# Allegro board RK3328_DDR3P216SD4_Template_V10_20170228.brd
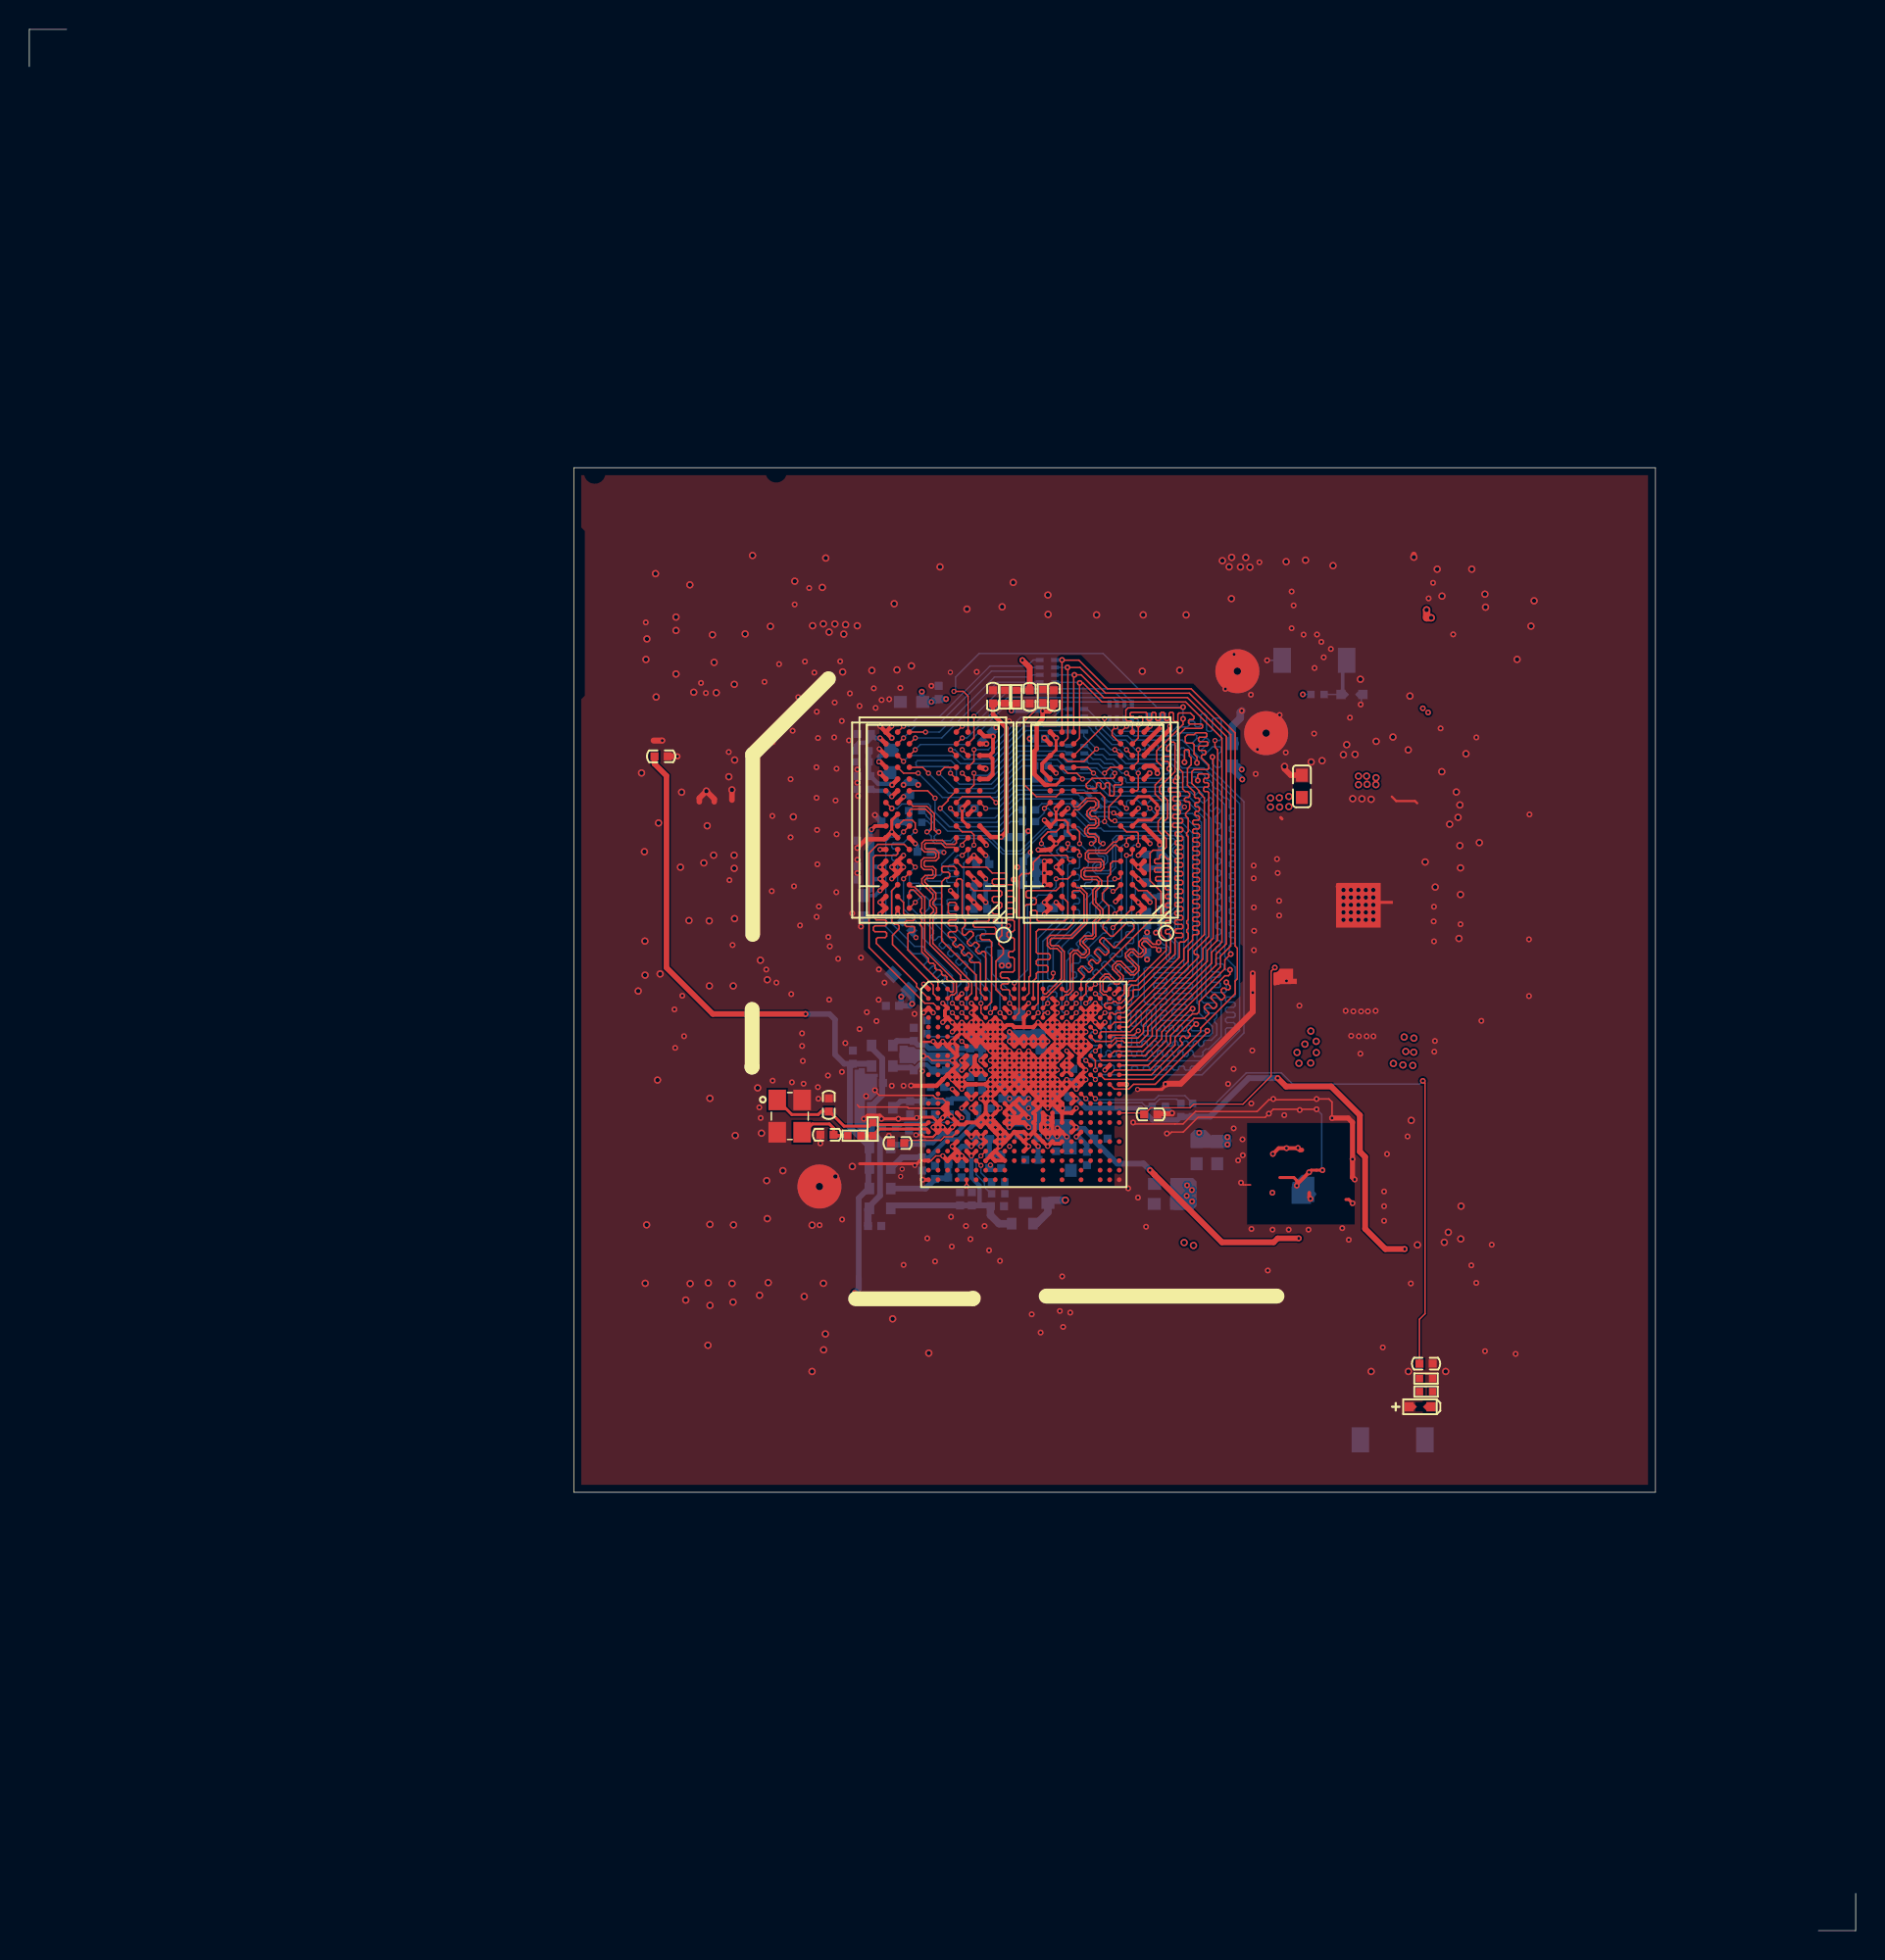
[diagram p0: board, top side]
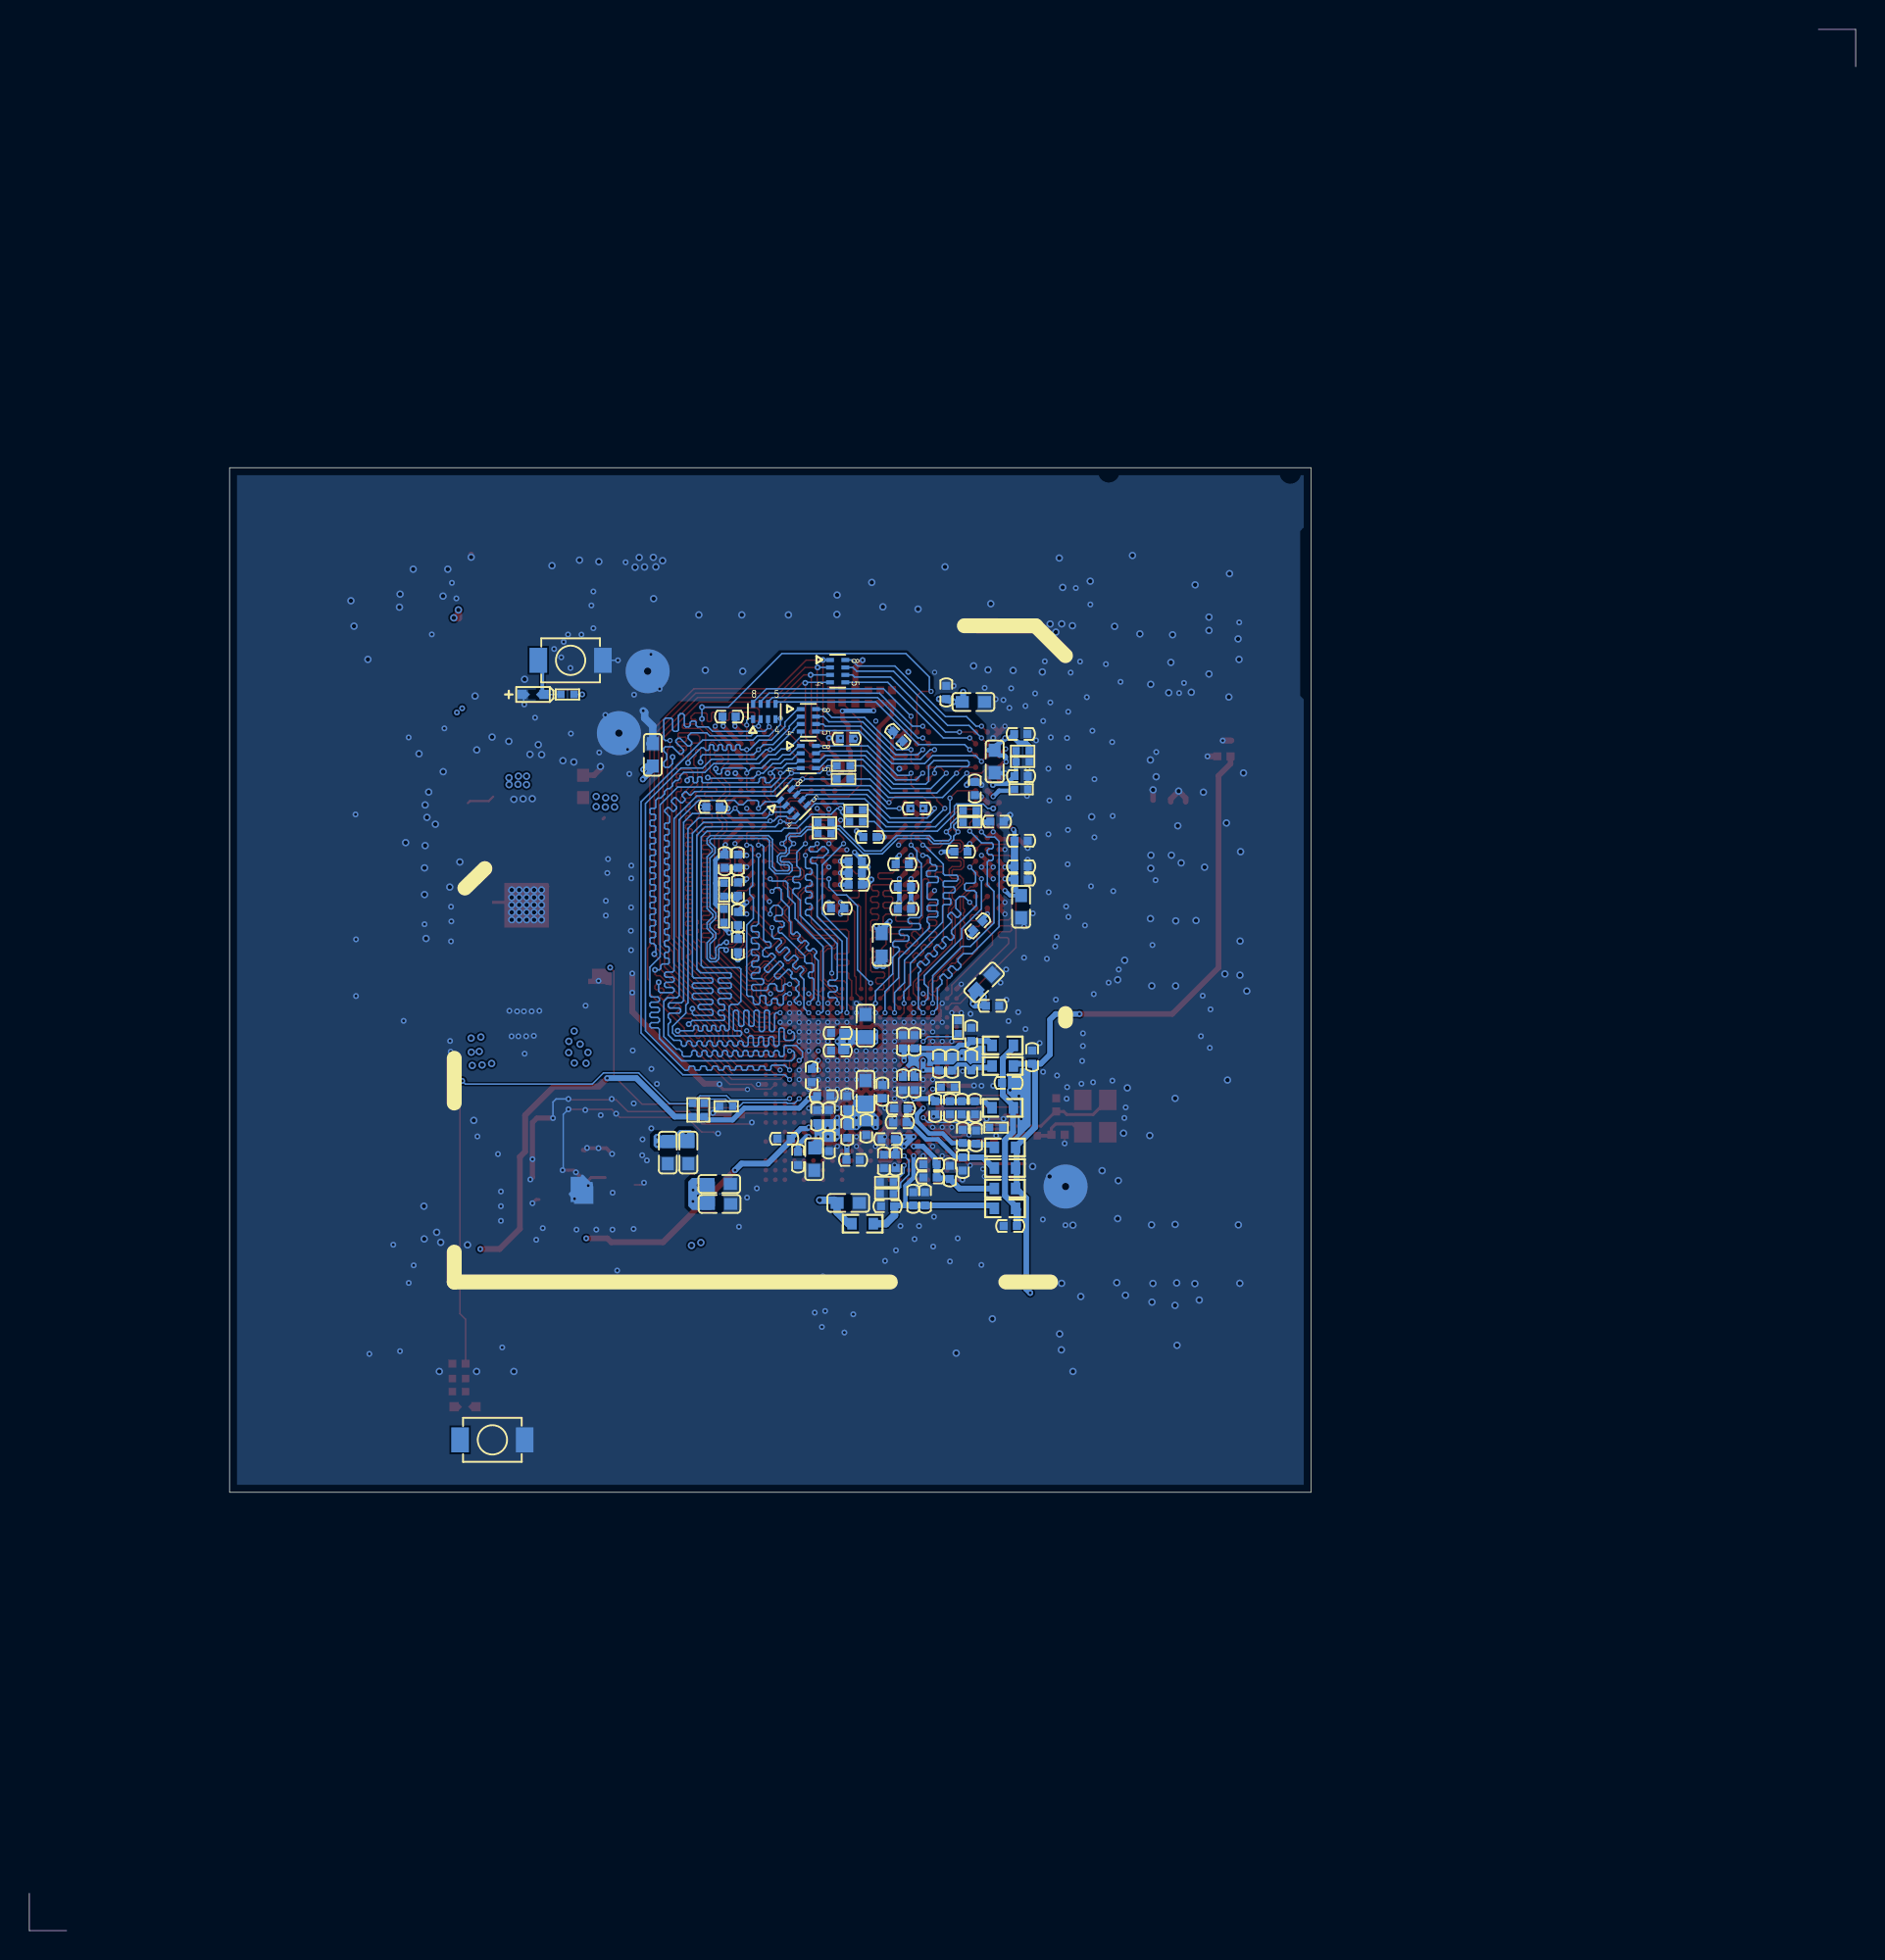
[diagram p1: board, bottom side, seen from below]

Outline 124.46 x 129.54 mm; copper layers: TOP, L2, L3, BOTTOM. Coordinates in mm from the lower left corner of the outline.
Outline path: 2.54,129.54 0,129.54 0,127 ; 124.46,2.54 124.46,0 121.92,0 ; 37.1,99.67 110.82,99.67 110.82,29.87 37.1,29.87 37.1,99.67

## Placement (name value [footprint] x y rotation side)
C800  10nF  [C0402]  70.77 55.46 90 bottom
C801  100nF  [C0402]  69.97 55.46 90 bottom
C802  100nF  [C0402]  69.97 53.56 270 bottom
C803  10uF  [C0603]  79.55 53.01 270 bottom
C804  22uF  [C0603]  70.97 52.56 270 bottom
C805  22uF  [C0603]  80.95 53.01 270 bottom
C806  10nF  [C0402]  66.32 57.16 90 bottom
C807  100nF  [C0402]  67.43 54.65 270 bottom
C808  100nF  [C0402]  68.72 56.41 90 bottom
C810  100nF  [C0402]  68.72 54.46 270 bottom
C811  10uF  [C0603]  67.47 57.16 90 bottom
C812  10uF  [C0603]  77.42 49.51 180 bottom
C813  22uF  [C0603]  68.65 49.58 180 bottom
C814  22uF  [C0603]  77.44 50.87 180 bottom
C900  12pF  [C0402]  54.36 54.23 180 top
C901  12pF  [C0402]  54.48 56.26 90 top
C902  100nF  [C0402]  60.27 59.06 90 bottom
C903  100nF  [C0402]  64.12 60.56 90 bottom
C904  4.7uF  [C0402]  60.27 61.06 90 bottom
C905  4.7uF  [C0402]  57.72 57.76 180 bottom
C906  100nF  [C0402]  64.92 60.56 90 bottom
C907  100nF  [C0402]  61.57 59.06 90 bottom
C908  4.7uF  [C0402]  62.47 59.06 90 bottom
C909  4.7uF  [C0402]  56.12 59.51 90 bottom
C910  100nF  [C0402]  70.32 56.86 180 bottom
C913  100nF  [C0402]  95.18 38.63 0 top
C1000  10nF  [C0402]  71.15 58.26 270 bottom
C1002  100nF  [C0402]  69.37 61.16 0 bottom
C1003  100nF  [C0402]  69.37 59.96 0 bottom
C1004  10uF  [C0603]  67.47 61.66 90 bottom
C1005  10uF  [C0603]  59.4 64.61 135 bottom
C1104  100nF  [C0402]  72.07 52.61 270 bottom
C1106  100nF  [C0402]  65.93 53.93 0 bottom
C1200  100nF  [C0402]  66.22 52.41 270 bottom
C1202  100nF  [C0402]  61.72 51.66 90 bottom
C1203  4.7uF  [C0402]  63.07 52.21 0 bottom
C1204  4.7uF  [C0402]  43.05 80.01 0 top
C1205  100nF  [C0402]  63.42 49.86 90 bottom
C1206  4.7uF  [C0402]  65.97 49.36 0 bottom
C1207  4.7uF  [C0402]  57.61 48.01 0 bottom
C1209  100nF  [C0402]  64.92 57.71 270 bottom
C1300  100nF  [C0402]  76.42 55.61 0 top
C1301  100nF  [C0402]  68.32 52.51 180 bottom
C1302  100nF  [C0402]  73.02 53.96 0 bottom
C1304  100nF  [C0402]  62.72 56.06 270 bottom
C1306  100nF  [C0402]  64.12 57.71 270 bottom
C1307  100nF  [C0402]  65.42 52.41 270 bottom
C1400  100nF  [C0402]  65.07 56.01 0 bottom
C1401  4.7uF  [C0402]  65.14 55.07 0 bottom
C1402  1nF  [C0402]  61.72 56.06 270 bottom
C1403  100nF  [C0402]  60.92 56.06 270 bottom
C1404  4.7uF  [C0402]  60.02 56.06 270 bottom
C1500  4.7uF  [C0402]  59.17 53.66 180 top
C1501  100nF  [C0402]  60.85 54.11 90 bottom
C1502  4.7uF  [C0402]  59.95 54.06 90 bottom
C1503  100nF  [C0402]  60.85 52.24 270 bottom
C1600  100nF  [C0402]  63.07 51.31 0 bottom
C1602  100nF  [C0402]  64.22 49.86 90 bottom
C1700  100pF  [C0402]  58.52 75.56 180 bottom
C1701  10nF  [C0402]  61.97 84.36 90 bottom
C1702  100nF  [C0402]  68.17 72.86 180 bottom
C1703  100nF  [C0402]  76.17 67.11 90 bottom
C1704  10nF  [C0402]  77.87 76.56 0 bottom
C1705  100nF  [C0402]  68.77 81.21 180 bottom
C1706  100nF  [C0402]  56.87 71.61 180 bottom
C1707  100nF  [C0402]  69.37 69.66 180 bottom
C1708  1nF  [C0402]  65.67 84.06 90 top
C1709  1nF  [C0402]  67.17 74.51 0 bottom
C1710  1nF  [C0402]  69.82 84.06 90 top
C1712  10uF  [C0603]  66.37 67.16 90 bottom
C1713  10uF  [C0603]  58.67 79.66 270 bottom
C1714  10uF  [C0603]  81.97 80.11 90 bottom
C1715  100nF  [C0402]  60.02 77.81 90 bottom
C1716  100nF  [C0402]  68.17 71.26 180 bottom
C1717  100nF  [C0402]  56.9 81.53 180 bottom
C1718  100nF  [C0402]  64.82 71.11 0 bottom
C1719  100nF  [C0402]  68.17 84.06 270 top
C1720  100nF  [C0402]  64.82 69.61 0 bottom
C1721  100nF  [C0402]  56.87 74.26 180 bottom
C1722  100nF  [C0402]  60.97 73.51 0 bottom
C1723  100nF  [C0402]  63.97 76.46 0 bottom
C1724  100nF  [C0402]  59.82 68.46 315 bottom
C1725  100nF  [C0402]  76.17 70.96 270 bottom
C1726  100nF  [C0402]  76.77 82.71 180 bottom
C1727  100nF  [C0402]  68.17 72.06 180 bottom
C1728  100nF  [C0402]  56.87 72.51 180 bottom
C1729  100nF  [C0402]  76.17 68.96 270 bottom
C1730  100nF  [C0402]  58.82 63.01 180 bottom
C1731  100nF  [C0402]  65.27 81.36 45 bottom
C1732  100nF  [C0402]  76.17 72.86 270 bottom
C1733  100nF  [C0402]  64.97 72.66 180 bottom
C1735  10uF  [C0603]  60.12 83.71 180 bottom
C1736  10uF  [C0603]  86.72 77.96 90 top
C1737  10uF  [C0603]  56.87 69.76 270 bottom
C1750  1nF  [C0402]  56.87 78.66 180 bottom
C1751  1nF  [C0402]  77.07 72.86 270 bottom
D900  ESD5451N  [ESD0402]  94.77 35.69 180 top
D1301  ESD5451N  [ESD0402]  90.14 84.22 0 bottom
L900  180R-100M  [L0603]  58.12 60.31 0 bottom
L901  180R-100M  [L0603]  58.12 58.91 0 bottom
L1201  180R-100M  [L0603]  57.97 50.56 0 bottom
L1202  180R-100M  [L0603]  57.97 49.21 0 bottom
L1203  180R-100M  [L0603]  67.67 48.17 180 bottom
L1401  180R-100M  [L0603]  57.97 51.96 0 bottom
L1402  180R-100M  [L0603]  58.12 56.06 0 bottom
L1501  180R-100M  [L0603]  57.97 53.36 0 bottom
R900  22R  [R0402]  56.22 54.16 180 top
R901  1M  [R0402]  57.47 54.61 90 top
R906  10K  [R0402]  78.47 55.91 90 bottom
R908  10K  [R0402]  76.97 56.16 0 bottom
R909  10K  [R0402]  79.27 55.91 90 bottom
R911  22R  [R0402]  95.18 36.73 180 top
R912  10K  [R0402]  95.18 37.62 0 top
R1200  133R  [R0402]  66.02 51.01 0 bottom
R1205  2K  [R0402]  61.17 61.56 90 bottom
R1301  22R  [R0402]  87.79 84.22 0 bottom
R1400  2K  [R0402]  61.87 57.46 180 bottom
R1501  2K  [R0402]  58.57 54.71 180 bottom
R1600  6.49K  [R0402]  66.02 50.21 0 bottom
R1700  49.9R  [R0402]  60.37 75.51 180 bottom
R1701  49.9R  [R0402]  60.37 76.31 180 bottom
R1702  240R  [R0402]  56.87 77.76 180 bottom
R1703  240R  [R0402]  69.07 84.11 90 top
R1705  1K  [R0402]  67.27 84.06 270 top
R1706  1K  [R0402]  56.77 80.39 0 bottom
R1707  1K  [R0402]  77.12 69.14 90 bottom
R1711  1K  [R0402]  66.47 84.06 90 top
R1712  56R  [R0402]  70.27 75.51 0 bottom
R1713  56R  [R0402]  70.27 74.76 0 bottom
R1714  56R  [R0402]  68.97 79.36 0 bottom
R1715  56R  [R0402]  68.97 78.46 0 bottom
R1716  56R  [R0402]  68.12 75.56 0 bottom
R1717  56R  [R0402]  68.12 76.36 0 bottom
R1718  1K  [R0402]  56.77 79.63 180 bottom
R1719  1K  [R0402]  77.11 70.92 270 bottom
RP1701  56R  [RP4_0408]  69.37 85.81 270 bottom
RP1702  56R  [RP4_0408]  71.37 79.96 270 bottom
RP1703  56R  [RP4_0408]  74.37 83.06 180 bottom
RP1704  56R  [RP4_0408]  71.37 82.46 270 bottom
RP1705  56R  [RP4_0408]  72.37 76.86 225 bottom
SW900  RECOVER_key  [TS-3220S]  92.9 33.44 0 bottom
SW1301  RESET_key  [TS-3220S]  87.57 86.55 0 bottom
U800  RK3328  [BGA395_14R00X14R00X1R24]  67.77 57.66 0 top
U1700  K4B4G1646Q  [FBGA96_14R00X11R00X1R20]  61.57 75.66 180 top
U1701  K4B4G1646Q  [FBGA96_14R00X11R00X1R20]  72.77 75.66 180 top
Y900  24MHz  [CRY4_3R20X2R50X0R80]  51.82 55.5 270 top

## Library data of the parts
C800-C808 C810-C814 C900-C910 C913 C1000 C1002-C1005 C1104 C1106 C1200 C1202-C1207 C1209 C1300-C1302 C1304 C1306 C1307 C1400-C1404 C1500-C1503 C1600 C1602 C1700-C1710 C1712-C1733 C1735-C1737 C1750 C1751 = CAP NP
D900 D1301 = DIODE BI_DIR TRIG
L900 L901 L1201-L1203 L1401 L1402 L1501 = INDUCTOR
R900 R901 R906 R908 R909 R911 R912 R1200 R1205 R1301 R1400 R1501 R1600 R1700-R1703 R1705-R1707 R1711-R1719 = RESISTOR
RP1701-RP1705 = RESISTOR 4PACK
SW900 SW1301 = SW KEY-SPST_0
U800 = DSP_RK3328
U1700 U1701 = DDR3_16bit
Y900 = CRYSTAL_4P

## Footprints (pads in the part's own frame, mm; a bottom-side part is the same pattern mirrored in y, then rotated)
BGA395_14R00X14R00X1R24
  round 0.325 smd: A1(-6.5,6.5) A2(-5.85,6.5) A3(-5.2,6.5) A5(-3.9,6.5) A7(-2.6,6.5) A10(-0.65,6.5) A11(0,6.5) A13(1.3,6.5) A15(2.6,6.5) A17(3.9,6.5) A18(4.55,6.5) A20(5.85,6.5) A21(6.5,6.5) AA1(-6.5,-6.5) AA2(-5.85,-6.5) AA4(-4.55,-6.5) AA5(-3.9,-6.5) AA6(-3.25,-6.5) AA7(-2.6,-6.5) AA8(-1.95,-6.5) AA9(-1.3,-6.5) AA13(1.3,-6.5) AA15(2.6,-6.5) AA17(3.9,-6.5) AA19(5.2,-6.5) AA20(5.85,-6.5) AA21(6.5,-6.5) B1(-6.5,5.85) B2(-5.85,5.85) B3(-5.2,5.85) B4(-4.55,5.85) B5(-3.9,5.85) B6(-3.25,5.85) B7(-2.6,5.85) B9(-1.3,5.85) B10(-0.65,5.85) B11(0,5.85) B12(0.65,5.85) B13(1.3,5.85) B14(1.95,5.85) B15(2.6,5.85) B16(3.25,5.85) B17(3.9,5.85) B18(4.55,5.85) B19(5.2,5.85) B20(5.85,5.85) B21(6.5,5.85) C1(-6.5,5.2) C2(-5.85,5.2) C3(-5.2,5.2) C4(-4.55,5.2) C5(-3.9,5.2) C6(-3.25,5.2) C7(-2.6,5.2) C8(-1.95,5.2) C9(-1.3,5.2) C10(-0.65,5.2) C11(0,5.2) C12(0.65,5.2) C13(1.3,5.2) C14(1.95,5.2) C15(2.6,5.2) C16(3.25,5.2) C17(3.9,5.2) C18(4.55,5.2) C19(5.2,5.2) C20(5.85,5.2) C21(6.5,5.2) D1(-6.5,4.55) D2(-5.85,4.55) D3(-5.2,4.55) D4(-4.55,4.55) D5(-3.9,4.55) D6(-3.25,4.55) D7(-2.6,4.55) D8(-1.95,4.55) D9(-1.3,4.55) D10(-0.65,4.55) D11(0,4.55) D12(0.65,4.55) D13(1.3,4.55) D14(1.95,4.55) D15(2.6,4.55) D16(3.25,4.55) D17(3.9,4.55) D18(4.55,4.55) D19(5.2,4.55) D20(5.85,4.55) D21(6.5,4.55) E1(-6.5,3.9) E2(-5.85,3.9) E3(-5.2,3.9) E4(-4.55,3.9) E5(-3.9,3.9) E6(-3.25,3.9) E7(-2.6,3.9) E8(-1.95,3.9) E9(-1.3,3.9) E10(-0.65,3.9) E11(0,3.9) E12(0.65,3.9) E13(1.3,3.9) E14(1.95,3.9) E15(2.6,3.9) E16(3.25,3.9) E17(3.9,3.9) E18(4.55,3.9) E19(5.2,3.9) E20(5.85,3.9) E21(6.5,3.9) F1(-6.5,3.25) F2(-5.85,3.25) F3(-5.2,3.25) F4(-4.55,3.25) F5(-3.9,3.25) F6(-3.25,3.25) F7(-2.6,3.25) F8(-1.95,3.25) F9(-1.3,3.25) F10(-0.65,3.25) F11(0,3.25) F12(0.65,3.25) F13(1.3,3.25) F17(3.9,3.25) F18(4.55,3.25) F19(5.2,3.25) F20(5.85,3.25) G2(-5.85,2.6) G3(-5.2,2.6) G4(-4.55,2.6) G5(-3.9,2.6) G6(-3.25,2.6) G7(-2.6,2.6) G8(-1.95,2.6) G9(-1.3,2.6) G10(-0.65,2.6) G11(0,2.6) G12(0.65,2.6) G13(1.3,2.6) G14(1.95,2.6) G15(2.6,2.6) G17(3.9,2.6) G18(4.55,2.6) G19(5.2,2.6) G20(5.85,2.6) G21(6.5,2.6) H2(-5.85,1.95) H3(-5.2,1.95) H4(-4.55,1.95) H5(-3.9,1.95) H6(-3.25,1.95) H7(-2.6,1.95) H8(-1.95,1.95) H9(-1.3,1.95) H10(-0.65,1.95) H11(0,1.95) H12(0.65,1.95) H13(1.3,1.95) H14(1.95,1.95) H15(2.6,1.95) H16(3.25,1.95) H17(3.9,1.95) H18(4.55,1.95) H19(5.2,1.95) H20(5.85,1.95) H21(6.5,1.95) J2(-5.85,1.3) J3(-5.2,1.3) J4(-4.55,1.3) J5(-3.9,1.3) J6(-3.25,1.3) J7(-2.6,1.3) J8(-1.95,1.3) J9(-1.3,1.3) J10(-0.65,1.3) J11(0,1.3) J12(0.65,1.3) J13(1.3,1.3) J14(1.95,1.3) J15(2.6,1.3) J16(3.25,1.3) J17(3.9,1.3) J18(4.55,1.3) J19(5.2,1.3) J20(5.85,1.3) J21(6.5,1.3) K1(-6.5,0.65) K2(-5.85,0.65) K3(-5.2,0.65) K5(-3.9,0.65) K6(-3.25,0.65) K7(-2.6,0.65) K8(-1.95,0.65) K9(-1.3,0.65) K10(-0.65,0.65) K11(0,0.65) K12(0.65,0.65) K13(1.3,0.65) K14(1.95,0.65) K15(2.6,0.65) K16(3.25,0.65) K17(3.9,0.65) K18(4.55,0.65) K19(5.2,0.65) K20(5.85,0.65) K21(6.5,0.65) L3(-5.2,0) L4(-4.55,0) L5(-3.9,0) L6(-3.25,0) L7(-2.6,0) L8(-1.95,0) L9(-1.3,0) L10(-0.65,0) L11(0,0) L12(0.65,0) L13(1.3,0) L14(1.95,0) L15(2.6,0) L16(3.25,0) L17(3.9,0) L18(4.55,0) L19(5.2,0) L20(5.85,0) L21(6.5,0) M2(-5.85,-0.65) M4(-4.55,-0.65) M5(-3.9,-0.65) M6(-3.25,-0.65) M7(-2.6,-0.65) M8(-1.95,-0.65) M9(-1.3,-0.65) M10(-0.65,-0.65) M11(0,-0.65) M12(0.65,-0.65) M13(1.3,-0.65) M14(1.95,-0.65) M15(2.6,-0.65) M16(3.25,-0.65) M17(3.9,-0.65) M18(4.55,-0.65) M19(5.2,-0.65) M20(5.85,-0.65) M21(6.5,-0.65) N1(-6.5,-1.3) N2(-5.85,-1.3) N3(-5.2,-1.3) N5(-3.9,-1.3) N6(-3.25,-1.3) N7(-2.6,-1.3) N8(-1.95,-1.3) N9(-1.3,-1.3) N10(-0.65,-1.3) N11(0,-1.3) N12(0.65,-1.3) N13(1.3,-1.3) N14(1.95,-1.3) N15(2.6,-1.3) N16(3.25,-1.3) N17(3.9,-1.3) N18(4.55,-1.3) N19(5.2,-1.3) N20(5.85,-1.3) P2(-5.85,-1.95) P3(-5.2,-1.95) P4(-4.55,-1.95) P6(-3.25,-1.95) P7(-2.6,-1.95) P8(-1.95,-1.95) P9(-1.3,-1.95) P10(-0.65,-1.95) P11(0,-1.95) P12(0.65,-1.95) P13(1.3,-1.95) P14(1.95,-1.95) P15(2.6,-1.95) P16(3.25,-1.95) P17(3.9,-1.95) P18(4.55,-1.95) P19(5.2,-1.95) P20(5.85,-1.95) P21(6.5,-1.95) R1(-6.5,-2.6) R2(-5.85,-2.6) R3(-5.2,-2.6) R4(-4.55,-2.6) R5(-3.9,-2.6) R7(-2.6,-2.6) R8(-1.95,-2.6) R9(-1.3,-2.6) R10(-0.65,-2.6) R11(0,-2.6) R12(0.65,-2.6) R13(1.3,-2.6) R14(1.95,-2.6) R15(2.6,-2.6) R16(3.25,-2.6) R17(3.9,-2.6) R18(4.55,-2.6) R19(5.2,-2.6) R20(5.85,-2.6) R21(6.5,-2.6) T1(-6.5,-3.25) T2(-5.85,-3.25) T3(-5.2,-3.25) T4(-4.55,-3.25) T5(-3.9,-3.25) T6(-3.25,-3.25) T7(-2.6,-3.25) T8(-1.95,-3.25) T9(-1.3,-3.25) T10(-0.65,-3.25) T11(0,-3.25) T12(0.65,-3.25) T13(1.3,-3.25) T14(1.95,-3.25) T15(2.6,-3.25) T16(3.25,-3.25) T17(3.9,-3.25) T18(4.55,-3.25) T19(5.2,-3.25) U3(-5.2,-3.9) U4(-4.55,-3.9) U5(-3.9,-3.9) U6(-3.25,-3.9) U7(-2.6,-3.9) U8(-1.95,-3.9) U9(-1.3,-3.9) U10(-0.65,-3.9) U11(0,-3.9) U12(0.65,-3.9) U13(1.3,-3.9) U14(1.95,-3.9) U15(2.6,-3.9) U16(3.25,-3.9) U17(3.9,-3.9) U18(4.55,-3.9) U19(5.2,-3.9) U20(5.85,-3.9) U21(6.5,-3.9) V1(-6.5,-4.55) V2(-5.85,-4.55) V3(-5.2,-4.55) V4(-4.55,-4.55) V5(-3.9,-4.55) V6(-3.25,-4.55) V7(-2.6,-4.55) V8(-1.95,-4.55) V9(-1.3,-4.55) V10(-0.65,-4.55) V11(0,-4.55) V12(0.65,-4.55) V13(1.3,-4.55) V14(1.95,-4.55) V15(2.6,-4.55) V16(3.25,-4.55) V17(3.9,-4.55) V18(4.55,-4.55) V19(5.2,-4.55) W1(-6.5,-5.2) W2(-5.85,-5.2) W3(-5.2,-5.2) W4(-4.55,-5.2) W5(-3.9,-5.2) W6(-3.25,-5.2) W7(-2.6,-5.2) W8(-1.95,-5.2) W9(-1.3,-5.2) W10(-0.65,-5.2) W11(0,-5.2) W12(0.65,-5.2) W13(1.3,-5.2) W14(1.95,-5.2) W15(2.6,-5.2) W16(3.25,-5.2) W17(3.9,-5.2) W18(4.55,-5.2) W19(5.2,-5.2) W20(5.85,-5.2) W21(6.5,-5.2) Y1(-6.5,-5.85) Y2(-5.85,-5.85) Y3(-5.2,-5.85) Y4(-4.55,-5.85) Y5(-3.9,-5.85) Y6(-3.25,-5.85) Y7(-2.6,-5.85) Y8(-1.95,-5.85) Y9(-1.3,-5.85) Y13(1.3,-5.85) Y15(2.6,-5.85) Y17(3.9,-5.85) Y19(5.2,-5.85) Y20(5.85,-5.85) Y21(6.5,-5.85)
C0402
  rect 0.55x0.55 smd: 1(-0.45,0) 2(0.45,0)
C0603
  rect 0.889x0.813 smd: 1(-0.762,0) 2(0.762,0)
CRY4_3R20X2R50X0R80
  rect 1.4x1.2 smd: 1(-1.1,-0.85) 2(1.1,-0.85) 3(1.1,0.85) 4(-1.1,0.85)
ESD0402
  custom 0.868x0.636 smd: 1(-0.635,0)
  custom 0.86x0.636 smd: 2(0.635,0)
FBGA96_14R00X11R00X1R20
  round 0.38 smd: A1(-3.2,6) A2(-2.4,6) A3(-1.6,6) A7(1.6,6) A8(2.4,6) A9(3.2,6) B1(-3.2,5.2) B2(-2.4,5.2) B3(-1.6,5.2) B7(1.6,5.2) B8(2.4,5.2) B9(3.2,5.2) C1(-3.2,4.4) C2(-2.4,4.4) C3(-1.6,4.4) C7(1.6,4.4) C8(2.4,4.4) C9(3.2,4.4) D1(-3.2,3.6) D2(-2.4,3.6) D3(-1.6,3.6) D7(1.6,3.6) D8(2.4,3.6) D9(3.2,3.6) E1(-3.2,2.8) E2(-2.4,2.8) E3(-1.6,2.8) E7(1.6,2.8) E8(2.4,2.8) E9(3.2,2.8) F1(-3.2,2) F2(-2.4,2) F3(-1.6,2) F7(1.6,2) F8(2.4,2) F9(3.2,2) G1(-3.2,1.2) G2(-2.4,1.2) G3(-1.6,1.2) G7(1.6,1.2) G8(2.4,1.2) G9(3.2,1.2) H1(-3.2,0.4) H2(-2.4,0.4) H3(-1.6,0.4) H7(1.6,0.4) H8(2.4,0.4) H9(3.2,0.4) J1(-3.2,-0.4) J2(-2.4,-0.4) J3(-1.6,-0.4) J7(1.6,-0.4) J8(2.4,-0.4) J9(3.2,-0.4) K1(-3.2,-1.2) K2(-2.4,-1.2) K3(-1.6,-1.2) K7(1.6,-1.2) K8(2.4,-1.2) K9(3.2,-1.2) L1(-3.2,-2) L2(-2.4,-2) L3(-1.6,-2) L7(1.6,-2) L8(2.4,-2) L9(3.2,-2) M1(-3.2,-2.8) M2(-2.4,-2.8) M3(-1.6,-2.8) M7(1.6,-2.8) M8(2.4,-2.8) M9(3.2,-2.8) N1(-3.2,-3.6) N2(-2.4,-3.6) N3(-1.6,-3.6) N7(1.6,-3.6) N8(2.4,-3.6) N9(3.2,-3.6) P1(-3.2,-4.4) P2(-2.4,-4.4) P3(-1.6,-4.4) P7(1.6,-4.4) P8(2.4,-4.4) P9(3.2,-4.4) R1(-3.2,-5.2) R2(-2.4,-5.2) R3(-1.6,-5.2) R7(1.6,-5.2) R8(2.4,-5.2) R9(3.2,-5.2) T1(-3.2,-6) T2(-2.4,-6) T3(-1.6,-6) T7(1.6,-6) T8(2.4,-6) T9(3.2,-6)
L0603
  rect 0.65x0.8 smd: 1(-0.725,0) 2(0.725,0)
R0402
  rect 0.508x0.508 smd: 1(-0.45,0) 2(0.45,0)
RP4_0408
  rect 0.279x0.533 smd: 1(-0.762,-0.521) 2(-0.254,-0.521) 3(0.254,-0.521) 4(0.762,-0.521) 5(0.762,0.521) 6(0.254,0.521) 7(-0.254,0.521) 8(-0.762,0.521)
TS-3220S
  rect 1.2x1.7 smd: 1(-2.2,0) 2(2.2,0)

## Nets
GND: C800.2 C801.2 C802.2 C803.2 C804.2 C805.2 C806.2 C807.2 C808.2 C810.2 C811.2 C812.2 C813.2 C814.2 C900.2 C901.2 C902.2 C903.2 C904.2 C905.2 C906.2 C907.2 C908.2 C909.2 C910.2 C913.2 C1000.2 C1002.2 C1003.2 C1004.2 C1005.2 C1104.2 C1106.2 C1200.2 C1202.2 C1203.2 C1204.2 C1205.2 C1206.2 C1207.2 C1209.2 C1300.2 C1301.2 C1302.2 C1304.2 C1306.2 C1307.2 C1400.2 C1401.2 C1402.2 C1403.2 C1404.2 C1500.2 C1501.2 C1502.2 C1503.2 C1600.2 C1602.2 C1700.2 C1701.2 C1702.2 C1703.2 C1704.2 C1705.2 C1706.2 C1707.2 C1708.2 C1709.2 C1710.2 C1712.2 C1713.2 C1714.2 C1715.2 C1716.2 C1717.2 C1718.2 C1719.2 C1720.2 C1721.2 C1722.2 C1723.2 C1724.2 C1725.2 C1726.2 C1727.2 C1728.2 C1729.2 C1730.2 C1731.2 C1732.2 C1733.2 C1735.2 C1736.2 C1737.2 C1750.2 C1751.2 D900.2 D1301.2 R908.2 R912.2 R1200.2 R1205.2 R1400.2 R1501.2 R1600.2 R1702.2 R1703.2 R1711.2 R1718.2 R1719.2 SW900.1 SW1301.1 U800.A1(VSS#A1) U800.A21(VSS#A21) U800.AA1(VSS#AA1) U800.AA5(VSS#AA5) U800.AA21(VSS#AA21) U800.B4(VSS#B4) U800.B14(VSS#B14) U800.B16(VSS#B16) U800.C1(VSS#C1) U800.C3(VSS#C3) U800.C6(VSS#C6) U800.C9(VSS#C9) U800.C11(VSS#C11) U800.C14(VSS#C14) U800.C17(VSS#C17) U800.C18(VSS#C18) U800.C19(VSS#C19) U800.D3(VSS#D3) U800.D6(VSS#D6) U800.D8(VSS#D8) U800.D11(VSS#D11) U800.D14(VSS#D14) U800.D17(VSS#D17) U800.D18(VSS#D18) U800.E4(VSS#E4) U800.E5(VSS#E5) U800.E6(VSS#E6) U800.E7(VSS#E7) U800.E8(VSS#E8) U800.E9(VSS#E9) U800.E10(VSS#E10) U800.E11(VSS#E11) U800.E12(VSS#E12) U800.E13(VSS#E13) U800.E14(VSS#E14) U800.E15(VSS#E15) U800.E16(VSS#E16) U800.E17(VSS#E17) U800.E19(VSS#E19) U800.F4(VSS#F4) U800.F5(VSS#F5) U800.F6(VSS#F6) U800.F7(VSS#F7) U800.F8(VSS#F8) U800.F9(VSS#F9) U800.F17(VSS#F17) U800.F20(VSS#F20) U800.G2(VSS#G2) U800.G3(VSS#G3) U800.G4(VSS#G4) U800.G6(VSS#G6) U800.G7(VSS#G7) U800.G8(VSS#G8) U800.G9(VSS#G9) U800.G14(VSS#G14) U800.G15(VSS#G15) U800.G17(VSS#G17) U800.G18(VSS#G18) U800.H4(VSS#H4) U800.H8(VSS#H8) U800.H9(VSS#H9) U800.H10(VSS#H10) U800.H11(VSS#H11) U800.H12(VSS#H12) U800.H13(VSS#H13) U800.H14(VSS#H14) U800.H15(VSS#H15) U800.H17(VSS#H17) U800.J4(VSS#J4) U800.J8(VSS#J8) U800.J9(VSS#J9) U800.J10(VSS#J10) U800.J11(VSS#J11) U800.J12(VSS#J12) U800.J13(VSS#J13) U800.J14(VSS#J14) U800.J17(VSS#J17) U800.J20(VSS#J20) U800.K3(VSS#K3) U800.K5(VSS#K5) U800.K8(VSS#K8) U800.K9(VSS#K9) U800.K10(VSS#K10) U800.K11(VSS#K11) U800.K12(VSS#K12) U800.K13(VSS#K13) U800.K14(VSS#K14) U800.K17(VSS#K17) U800.L4(VSS#L4) U800.L5(VSS#L5) U800.L6(VSS#L6) U800.L7(VSS#L7) U800.L8(VSS#L8) U800.L9(VSS#L9) U800.L10(VSS#L10) U800.L11(VSS#L11) U800.L12(VSS#L12) U800.L13(VSS#L13) U800.L14(VSS#L14) U800.L15(VSS#L15) U800.L16(VSS#L16) U800.L17(VSS#L17) U800.L21(VSS#L21) U800.M7(VSS#M7) U800.M8(VSS#M8) U800.M9(VSS#M9) U800.M10(VSS#M10) U800.M11(VSS#M11) U800.M12(VSS#M12) U800.M13(VSS#M13) U800.M14(VSS#M14) U800.M15(TEST_D) U800.N3(VSS#N3) U800.N7(VSS#N7) U800.N8(VSS#N8) U800.N12(VSS#N12) U800.N13(VSS#N13) U800.N14(VSS#N14) U800.N15(VSS#N15) U800.P3(VSS#P3) U800.P7(VSS#P7) U800.P8(VSS#P8) U800.P12(VSS#P12) U800.P15(VSS#P15) U800.P16(EFUSE_VP) U800.R2(VSS#R2) U800.R4(CODEC_AVSS) U800.R5(VSS#R5) U800.R7(VSS#R7) U800.R8(VSS#R8) U800.R12(VSS#R12) U800.R15(VSS#R15) U800.T2(VSS#T2) U800.T3(VSS#T3) U800.T8(VSS#T8) U800.T9(VSS#T9) U800.T10(VSS#T10) U800.T11(VSS#T11) U800.T12(VSS#T12) U800.U4(VSS#U4) U800.U8(VSS#U8) U800.U9(VSS#U9) U800.U11(VSS#U11) U800.U13(VSS#U13) U800.U14(VSS#U14) U800.U15(VSS#U15) U800.V4(VSS#V4) U800.V8(VSS#V8) U800.V11(VSS#V11) U800.W1(VSS#W1) U800.W3(VSS#W3) U800.W4(VSS#W4) U800.W5(VSS#W5) U800.W7(VSS#W7) U800.W8(VSS#W8) U800.W9(VSS#W9) U1700.A9(VSS1) U1700.B1(VSSQ1) U1700.B3(VSS2) U1700.B9(VSSQ2) U1700.D1(VSSQ3) U1700.D8(VSSQ4) U1700.E1(VSS3) U1700.E2(VSSQ5) U1700.E8(VSSQ6) U1700.F9(VSSQ7) U1700.G1(VSSQ8) U1700.G8(VSS4) U1700.G9(VSSQ9) U1700.J2(VSS5) U1700.J8(VSS6) U1700.M1(VSS7) U1700.M9(VSS8) U1700.P1(VSS9) U1700.P9(VSS10) U1700.T1(VSS11) U1700.T9(VSS12) U1701.A9(VSS1) U1701.B1(VSSQ1) U1701.B3(VSS2) U1701.B9(VSSQ2) U1701.D1(VSSQ3) U1701.D8(VSSQ4) U1701.E1(VSS3) U1701.E2(VSSQ5) U1701.E8(VSSQ6) U1701.F9(VSSQ7) U1701.G1(VSSQ8) U1701.G8(VSS4) U1701.G9(VSSQ9) U1701.J2(VSS5) U1701.J8(VSS6) U1701.M1(VSS7) U1701.M9(VSS8) U1701.P1(VSS9) U1701.P9(VSS10) U1701.T1(VSS11) U1701.T9(VSS12) Y900.2(GND1) Y900.4(GND2)
VCC18_CODEC: C1501.1 C1502.1 L1501.2 U800.N5(CODEC_AVDD_1V8)
VCC_18: C909.1 C910.1 C1204.1 L901.1 L1201.1 L1401.1 L1501.1 R906.1 R909.1 U800.M16(SARADC_AVDD_1V8) U800.N16(OTP_VCC18)
VCC_DDR: C1000.1 C1002.1 C1003.1 C1004.1 C1005.1 C1701.1 C1702.1 C1703.1 C1704.1 C1705.1 C1706.1 C1707.1 C1712.1 C1713.1 C1714.1 C1715.1 C1716.1 C1717.1 C1718.1 C1719.1 C1720.1 C1721.1 C1722.1 C1723.1 C1724.1 C1725.1 C1726.1 C1727.1 C1728.1 C1729.1 C1730.1 C1731.1 C1732.1 C1733.1 C1735.1 C1736.1 C1737.1 R1705.1 R1706.1 R1707.1 U800.F10(VDD_DDRIO#F10) U800.F11(VDD_DDRIO#F11) U800.F12(VDD_DDRIO#F12) U800.F13(VDD_DDRIO#F13) U800.G10(VDD_DDRIO#G10) U800.G11(VDD_DDRIO#G11) U800.G12(VDD_DDRIO#G12) U800.G13(VDD_DDRIO#G13) U800.H16(VDD_DDRIO#H16) U800.J15(VDD_DDRIO#J15) U800.J16(VDD_DDRIO#J16) U800.K15(VDD_DDRIO#K15) U800.K16(VDD_DDRIO#K16) U1700.A1(VDDQ1) U1700.A8(VDDQ2) U1700.B2(VDD1) U1700.C1(VDDQ3) U1700.C9(VDDQ4) U1700.D2(VDDQ5) U1700.D9(VDD2) U1700.E9(VDDQ6) U1700.F1(VDDQ7) U1700.G7(VDD3) U1700.H2(VDDQ8) U1700.H9(VDDQ9) U1700.K2(VDD4) U1700.K8(VDD5) U1700.N1(VDD6) U1700.N9(VDD7) U1700.R1(VDD8) U1700.R9(VDD9) U1701.A1(VDDQ1) U1701.A8(VDDQ2) U1701.B2(VDD1) U1701.C1(VDDQ3) U1701.C9(VDDQ4) U1701.D2(VDDQ5) U1701.D9(VDD2) U1701.E9(VDDQ6) U1701.F1(VDDQ7) U1701.G7(VDD3) U1701.H2(VDDQ8) U1701.H9(VDDQ9) U1701.K2(VDD4) U1701.K8(VDD5) U1701.N1(VDD6) U1701.N9(VDD7) U1701.R1(VDD8) U1701.R9(VDD9)
VCC_IO: C1106.1 C1200.1 C1209.1 C1302.1 C1306.1 C1307.1 U800.H6(VCCIO6) U800.J6(USB30_AVDD_3V3) U800.K6(VCCIO_PMU) U800.K7(USB30_VBUS) U800.R16(VCCIO5) U800.T5(USB20_AVDD_3V3) U800.T6(USB20_VBUS) U800.T7(VCCIO1) U800.T16(GPIO2_B4/SPI_CSN1_M0/FLASH_VOL_) U800.U7(VCCIO3)
VCCIO_FLASH: C1104.1 U800.T17(VCCIO2)
VCCIO_WL: C1301.1 U800.U12(VCCIO4)
VDD_10: C905.1 C1207.1 L900.1 L1202.1 L1402.1
VDD_ARM: C800.1 C801.1 C802.1 C803.1 C804.1 C805.1 U800.P13(VDD_CORE#P13) U800.P14(VDD_CORE#P14) U800.R13(VDD_CORE#R13) U800.R14(VDD_CORE#R14) U800.T13(VDD_CORE#T13) U800.T14(VDD_CORE#T14) U800.T15(VDD_CORE#T15)
VDD_LOG: C806.1 C807.1 C808.1 C810.1 C811.1 C812.1 C813.1 C814.1 L1203.1 U800.N9(VDD_LOGIC#N9) U800.N10(VDD_LOGIC#N10) U800.N11(VDD_LOGIC#N11) U800.P9(VDD_LOGIC#P9) U800.P10(VDD_LOGIC#P10) U800.P11(VDD_LOGIC#P11) U800.R9(VDD_LOGIC#R9) U800.R10(VDD_LOGIC#R10) U800.R11(VDD_LOGIC#R11)
DDR-A0: RP1702.5 U1700.N3(A0)
DDR-A1: RP1703.5 U1700.P7(A1)
DDR-A2: RP1704.6 U1700.P3(A2)
DDR-A3: RP1704.8 U1700.N2(A3)
DDR-A4: RP1704.5 U1700.P8(A4)
DDR-A5: RP1704.7 U1700.P2(A5)
DDR-A6: RP1701.7 U1700.R8(A6)
DDR-A7: RP1703.8 U1700.R2(A7)
DDR-A8: RP1701.8 U1700.T8(A8)
DDR-A9: RP1703.6 U1700.R3(A9)
DDR-A10: R1717.1 U1700.L7(A10/AP)
DDR-A11: RP1701.5 U1700.R7(A11)
DDR-A12: R1714.1 U1700.N7(A12/BC#)
DDR-A13: RP1703.7 U1700.T3(A13)
DDR-A14: RP1701.6 U1700.T7(A14)
DDR-BA0: RP1702.7 U1700.M2(BA0)
DDR-BA1: R1715.1 U1700.N8(BA1)
DDR-BA2: RP1702.6 U1700.M3(BA2)
DDR-CASN: RP1705.8 U1700.K3(CAS#)
DDR-CKE0: R1716.1 U1700.K9(CKE0)
DDR-CLKN: R1701.1 R1712.1 U1700.K7(CK#)
DDR-CLKP: R1700.1 R1713.1 U1700.J7(CK)
DDR-CS0N: RP1702.8 U1700.L2(CS#0)
DDR-ODT0: RP1705.7 U1700.K1(ODT0)
DDR-RASN: RP1705.6 U1700.J3(RAS#)
DDR-WEN: RP1705.5 U1700.L3(WE#)
DDR_A0: RP1702.4 U800.G19(DDR3_A0/DDR4_A10) U1701.N3(A0)
DDR_A1: RP1703.4 U800.K18(DDR3_A1/DDR4_A9) U1701.P7(A1)
DDR_A2: RP1704.3 U800.H18(DDR3_A2/DDR4_A4) U1701.P3(A2)
DDR_A3: RP1704.1 U800.E20(DDR3_A3/DDR4_A6) U1701.N2(A3)
DDR_A4: RP1704.4 U800.H21(DDR3_A4/DDR4_A5) U1701.P8(A4)
DDR_A5: RP1704.2 U800.D21(DDR3_A5/DDR4_A8) U1701.P2(A5)
DDR_A6: RP1701.2 U800.H20(DDR3_A6/DDR4_A7) U1701.R8(A6)
DDR_A7: RP1703.1 U800.D20(DDR3_A7/DDR4_A11) U1701.R2(A7)
DDR_A8: RP1701.1 U800.K19(DDR3_A8/DDR4_A13) U1701.T8(A8)
DDR_A9: RP1703.3 U800.F19(DDR3_A9/DDR4_A0) U1701.R3(A9)
DDR_A10: R1717.2 U800.K21(DDR3_A10/DDR4_CS0N) U1701.L7(A10/AP)
DDR_A11: RP1701.4 U800.G20(DDR3_A11/DDR4_A3) U1701.R7(A11)
DDR_A12: R1714.2 U800.J21(DDR3_A12/DDR4_BA1) U1701.N7(A12/BC#)
DDR_A13: RP1703.2 U800.F18(DDR3_A13/DDR4_A2) U1701.T3(A13)
DDR_A14: RP1701.3 U800.G21(DDR3_A14/DDR4_A1) U1701.T7(A14)
DDR_BA0: RP1702.2 U800.C21(DDR3_BA0/DDR4_BG0) U1701.M2(BA0)
DDR_BA1: R1715.2 U800.K20(DDR3_BA1/DDR4_CASN/DDR4_A15) U1701.N8(BA1)
DDR_BA2: RP1702.3 U800.E21(DDR3_BA2/DDR4_BA0) U1701.M3(BA2)
DDR_CASN: RP1705.1 U800.J18(DDR3_CASN/DDR4_A12) U1701.K3(CAS#)
DDR_CKE0: R1716.2 U800.L20(DDR3_CKE/DDR4_RASN/DDR4_A16) U1701.K9(CKE0)
DDR_CLKN: R1712.2 U800.A20(DDR3_CLKN/DDR4_CLKN) U1701.K7(CK#)
DDR_CLKP: R1713.2 U800.B20(DDR3_CLKP/DDR4_CLKP) U1701.J7(CK)
DDR_CS0N: RP1702.1 U800.C20(DDR3_CSN0/DDR4_ACTN) U1701.L2(CS#0)
DDR_D0: U800.D7(DDR_DQ0) U1700.A7(DQ12)
DDR_D1: U800.A7(DDR_DQ1) U1700.C3(DQ9)
DDR_D2: U800.C5(DDR_DQ2) U1700.D7(DQ8)
DDR_D3: U800.B2(DDR_DQ3) U1700.C8(DQ10)
DDR_D4: U800.B9(DDR_DQ4) U1700.C2(DQ11)
DDR_D5: U800.C7(DDR_DQ5) U1700.A2(DQ13)
DDR_D6: U800.B7(DDR_DQ6) U1700.A3(DQ15)
DDR_D7: U800.A2(DDR_DQ7) U1700.B8(DQ14)
DDR_D8: U800.B1(DDR_DQ8) U1700.F8(DQ3)
DDR_D9: U800.C8(DDR_DQ9) U1700.G2(DQ6)
DDR_D10: U800.C2(DDR_DQ10) U1700.F7(DQ1)
DDR_D11: U800.B10(DDR_DQ11) U1700.E3(DQ0)
DDR_D12: U800.D4(DDR_DQ12) U1700.H7(DQ7)
DDR_D13: U800.C10(DDR_DQ13) U1700.H3(DQ4)
DDR_D14: U800.C4(DDR_DQ14) U1700.H8(DQ5)
DDR_D15: U800.D9(DDR_DQ15) U1700.F2(DQ2)
DDR_D16: U800.D16(DDR_DQ16) U1701.A2(DQ13)
DDR_D17: U800.C15(DDR_DQ17) U1701.C3(DQ9)
DDR_D18: U800.C16(DDR_DQ18) U1701.A3(DQ15)
DDR_D19: U800.B12(DDR_DQ19) U1701.A7(DQ12)
DDR_D20: U800.B11(DDR_DQ20) U1701.B8(DQ14)
DDR_D21: U800.A10(DDR_DQ21) U1701.D7(DQ8)
DDR_D22: U800.B17(DDR_DQ22) U1701.C2(DQ11)
DDR_D23: U800.A11(DDR_DQ23) U1701.C8(DQ10)
DDR_D24: U800.C12(DDR_DQ24) U1701.H7(DQ7)
DDR_D25: U800.D13(DDR_DQ25) U1701.F8(DQ3)
DDR_D26: U800.B19(DDR_DQ26) U1701.H3(DQ4)
DDR_D27: U800.B18(DDR_DQ27) U1701.G2(DQ6)
DDR_D28: U800.D12(DDR_DQ28) U1701.H8(DQ5)
DDR_D29: U800.C13(DDR_DQ29) U1701.F7(DQ1)
DDR_D30: U800.A18(DDR_DQ30) U1701.F2(DQ2)
DDR_D31: U800.A17(DDR_DQ31) U1701.E3(DQ0)
DDR_DM0: U800.B6(DDR_DQM0) U1700.D3(UDM)
DDR_DM1: U800.D5(DDR_DQM1) U1700.E7(LDM)
DDR_DM2: U800.D15(DDR_DQM2) U1701.D3(UDM)
DDR_DM3: U800.D10(DDR_DQM3) U1701.E7(LDM)
DDR_DQS0N: U800.A3(DDR_DQS0_N) U1700.B7(UDQS#)
DDR_DQS0P: U800.B3(DDR_DQS0_P) U1700.C7(UDQS)
DDR_DQS1N: U800.A5(DDR_DQS1_N) U1700.G3(LDQS#)
DDR_DQS1P: U800.B5(DDR_DQS1_P) U1700.F3(LDQS)
DDR_DQS2N: U800.A13(DDR_DQS2_N) U1701.B7(UDQS#)
DDR_DQS2P: U800.B13(DDR_DQS2_P) U1701.C7(UDQS)
DDR_DQS3N: U800.A15(DDR_DQS3_N) U1701.G3(LDQS#)
DDR_DQS3P: U800.B15(DDR_DQS3_P) U1701.F3(LDQS)
DDR_ODT0: RP1705.2 U800.E18(DDR3_ODT0/DDR4_WEN/DDR4_A14) U1701.K1(ODT0)
DDR_RASN: RP1705.3 U800.D19(DDR3_RASN/DDR4_CKE) U1701.J3(RAS#)
DDR_RST: U800.B21(DDR3_RESETN/DDR4_RESETN) U1700.T2(RESET#) U1701.T2(RESET#)
DDR_WEN: RP1705.4 U800.H19(DDR3_WEN/DDR4_BG1) U1701.L3(WE#)
RECOVER: C913.1 R909.2 R911.2 R912.1 U800.M18(SARADC_IN0)
RESET: C1300.1 R1301.1 U800.P21(NPOR_U)
SARADC_IN1: R906.2 R908.1 U800.M17(SARADC_IN1)
USB20/FEPHY_1V0: C1205.1 C1206.1 C1602.1 L1202.2 L1203.2 U800.V5(USB20_DVDD_1V0) U800.V6(FEPHY_AVDD_1V0)
USB20/FEPHY_1V8: C1202.1 C1203.1 C1600.1 L1201.2 U800.U5(USB20_AVDD_1V8) U800.U6(FEPHY_AVDD_1V8)
VCC18_HDMI/VADC: C1400.1 C1401.1 C1503.1 L1401.2 U800.N6(VDAC_AVDD_1V8) U800.P6(HDMI_AVDD_1V8)
VDD10_HDMI/PMU: C1304.1 C1402.1 C1403.1 C1404.1 L1402.2 U800.M5(VDD_PMU) U800.M6(HDMI_AVDD_1V0)
VDDPLL/USB30_1V0: C903.1 C904.1 C906.1 L900.2 U800.H7(PLL_DVDD_1V0) U800.J7(USB30_DVDD_1V0)
VDDPLL/USB30_1V8: C902.1 C907.1 C908.1 L901.2 U800.H5(PLL_AVDD_1V8) U800.J5(USB30_AVDD_1V8)
VREF_DDR_CA_1: C1750.1 R1706.2 R1718.1 U1700.M8(VREFCA)
VREF_DDR_DQ_1: C1708.1 C1709.1 C1710.1 R1705.2 R1711.1 U1700.H1(VREFDQ) U1701.M8(VREFCA)
VREF_DDR_DQ_2: C1751.1 R1707.2 R1719.1 U1701.H1(VREFDQ)
N16770531: R900.1 R901.1 U800.T1(XOUT24M)
N16770535: C900.1 R900.2 Y900.3(XOUT)
N16770721: C901.1 R901.2 U800.R1(XIN24M) Y900.1(XIN)
N16780662: R1200.1 U800.W6(USB20_EXTR)
N16789269: R1400.1 U800.M4(HDMI_EXTR)
N16790179: R1501.1 U800.P4(VDAC_IREF)
N16792726: C1500.1 U800.T4(CODEC_VCM)
N17825586: R1205.1 U800.G5(USB30_EXTR)
N18670301: R1600.1 U800.V7(FEPHY_EXTRES)
N18678062: R1702.1 U1700.L8(ZQ0)
N18678086: R1703.1 U1701.L8(ZQ0)
N18754897: D900.1 R911.1 SW900.2
N19933811: D1301.1 R1301.2 SW1301.2
N20035982: C1700.1 R1700.2 R1701.2

Pads without a net: U800 AA2 AA4 AA6 AA7 AA8 AA9 AA13 AA15 AA17 AA19 AA20 D1 D2 E1 E2 E3 F1 F2 F3 H2 H3 J2 J3 J19 K1 K2 L3 L18 L19 M2 M19 M20 M21 N1 N2 N17 N18 N19 N20 P2 P17 P18 P19 P20 R3 R17 R18 R19 R20 R21 T18 T19 U3 U10 U16 U17 U18 U19 U20 U21 V1 V2 V3 V9 V10 V12 V13 V14 V15 V16 V17 V18 V19 W2 W10 W11 W12 W13 W14 W15 W16 W17 W18 W19 W20 W21 Y1 Y2 Y3 Y4 Y5 Y6 Y7 Y8 Y9 Y13 Y15 Y17 Y19 Y20 Y21; U1700 J1 J9 L1 L9 M7; U1701 J1 J9 L1 L9 M7

## Via types
v1: diameter 0.35, hole 0.2, TOP to BOTTOM, 333 vias
v2: diameter 0.4, hole 0.2, TOP to BOTTOM, 301 vias
v3: diameter 0.5, hole 0.3, TOP to BOTTOM, 210 vias
v4: diameter 3, hole 0.5, TOP to BOTTOM, 3 vias

## Routing (per net, layer and track width the routed paths; a pad name or vN(x,y) marks a point on that pad's centre or on a via; arc(x,y) is an arc through that point)
GND: length 393.1
  TOP w0.1: 82.72,50.81 v2(82.57,50.96) ; 56.42,56.26 56.57,56.11 ; 56.57,56.11 59.85,56.11 59.92,56.04 62.25,56.04 ; 56.57,56.11 56.52,56.11 ; v2(57.62,57.26) 57.62,57.21 57.92,56.91 61.58,56.91 61.81,56.69 62.25,56.69 U800.N3 ; v1(62.25,52.79) 61.77,52.79 61.43,52.45 61.29,52.45 U800.W1 ; v2(87.72,55.96) 84.77,55.96 v2(84.47,55.66) 84.22,55.41 79.64,55.41 78.64,54.41 77.84,54.41 77.74,54.31 v2(77.52,54.31) ; v1(75.57,61.31) 75.27,61.01 73.72,61.01 U800.F20 ; v2(88.77,55.36) 88.77,56.46 88.57,56.66 v2(87.72,56.66) 87.7,56.69 87.62,56.61 84.47,56.61 83.67,55.81 79.47,55.81 78.62,54.96 78.07,54.96 75.32,54.96 v2(75.22,55.06)
  TOP w0.102: 87.22,50.31 87.22,50.27 ; 83.22,50.81 82.72,50.81 ; v1(62.25,52.79) U800.W3 ; 76.91,55.61 77.4,55.61 77.5,55.71 v2(77.87,55.71) ; 92.87,81.26 v3(92.93,81.32) ; 60.92,59.6 60.92,59.63 60.94,59.63 61.01,59.56 61.24,59.56 61.51,59.29 v1(62.9,59.29) ; 60.92,59.6 v2(60.92,59.59) ; 60.92,59.6 60.89,59.63 60.88,59.61 60.82,59.61 ; v1(69.17,70.06) U1701.B9 ; 62.25,56.04 U800.N3 ; C900.2 v2(53.91,53.64)
  TOP w0.15: 92.85,77.27 93.15,76.97 94.43,76.97 94.58,76.82 ; U800.T2 61.59,54.07 60.98,54.07 60.85,54.21 v1(60.42,54.21)
  TOP w0.152: 60.94,60.56 61.57,60.56 v1(61.6,60.59) ; U800.AA5 v1(63.87,50.71)
  TOP w0.2: 56.58,52.25 60.49,52.25 60.7,52.46 U800.W1 ; v2(69.97,81.26) 69.97,80.46 U1701.P9 ; v2(87.31,49.86) 87.31,49.88 87.22,49.96 ; v1(75.52,57.31) 77.17,57.31 77.43,57.56 v2(77.43,57.67) ; 86.37,50.83 86.37,51.11 86.17,51.31 85.22,51.31 ; v2(87.21,51.67) 87.36,51.81 v2(88.12,51.81) ; U800.R4 63.22,55.01 ; 61.6,60.55 v1(61.6,60.59) ; v2(56.87,55.31) 57.12,55.56 57.97,55.56 58.22,55.31 v2(59.22,55.31) 60.47,55.31 60.59,55.42 61.56,55.42 U800.R2 ; U1700.J8 58.77,75.66 v1(58.77,74.86) ; v2(90.17,49.56) 90.07,49.66
  TOP w0.203: v2(90.17,49.56) 89.92,49.81 89.72,49.81 ; 85.37,75.75 85.28,75.84
  TOP w0.25: U1701.F9 v1(69.97,74.06) ; v1(69.97,74.06) U1701.G8 ; v1(69.97,74.06) U1701.G9
  TOP w0.254: U800.K9 v1(66.15,58.64) U800.J8 ; U800.K9 v1(66.8,58.64) U800.J10 ; U800.K9 v1(66.8,57.99) U800.L10 ; U800.K9 v1(66.15,57.99) U800.L8 ; U800.J10 v1(67.45,58.64) U800.K11 ; U800.J10 v1(66.8,59.29) U800.H9 ; U800.J10 v1(67.45,59.29) U800.H11 ; U800.E17 v1(71.35,61.24) U800.F17 ; U800.E17 v1(72,61.89) U800.D17 ; U800.E17 v1(72,61.24) U800.F17 ; U800.E17 v1(71.35,61.89) U800.D17 ; U800.H13 69.4,59.94 U800.H14 ; U800.H13 v1(69.4,59.29) U800.H14 ; U800.H13 v1(68.75,59.29) U800.H12 ; U800.T10 66.8,54.09 U800.T9 ; U800.T10 U800.U11 ; U800.T10 U800.T11 v1(68.1,54.09) U800.U11 ; U800.K12 v1(68.1,58.64) U800.K11 ; U800.K12 v1(68.1,57.99) U800.K11 ; U800.K12 v1(68.75,57.99) U800.K13 ; U800.K12 v1(68.75,58.64) U800.K13 ; v1(65.5,55.39) U800.R8 ; v1(65.5,55.39) U800.R7 ; v1(65.5,55.39) U800.P8 v1(66.15,56.04) U800.N8 v1(65.5,56.69) ; v1(65.5,55.39) U800.P7 ; v1(69.4,53.44) U800.U13 U800.T12 68.52,54.51 68.52,54.97 U800.R12 68.55,55.19 68.55,55.59 U800.P12 68.74,56.03 ; U800.R7 65.47,54.76 ; U800.R7 65.12,55.06 64.82,54.76 64.52,55.06 U800.R5 63.74,54.93 63.36,54.93 U800.R4 v1(62.9,54.74) ; U800.R7 64.85,55.39 U800.P7 ; U800.K5 v1(63.55,57.99) ; v1(63.55,57.99) U800.L4 ; v1(63.55,57.99) U800.L5 v1(63.55,57.34) ; v1(72.65,62.54) U800.C19 v1(72.65,63.19) ; U800.K11 67.45,57.99 67.45,57.98 67.13,57.66 U800.L10 ; U800.H11 v1(67.45,59.94) ; U800.H11 v1(68.1,59.29) U800.H12 ; U800.H11 v1(68.1,59.94) U800.H12 ; U800.U14 69.86,53.63 70.24,53.63 U800.U15 ; U800.L16 71.42,58.06 71.42,57.91 U800.L17 ; U800.L16 v1(71.35,57.34) U800.L17 ; U800.L16 70.7,57.34 U800.L15 ; U800.L16 v1(70.7,57.99) U800.L15 ; v1(66.16,54.09) 65.84,53.76 U800.U8 v1(66.15,53.44) U800.V8 ; v1(66.16,54.09) 66.47,54.4 U800.T9 ; v1(66.16,54.09) 66.47,53.77 U800.U9 ; v1(66.16,54.09) 66.15,54.09 U800.T8 66.11,54.7 ; v1(66.16,54.09) 66.48,53.77 ; U800.G17 v1(71.35,59.94) ; U800.G17 v1(72,60.59) U800.F17 ; U800.G17 71.92,60.01 ; U800.G17 v1(71.35,60.59) ; U800.T9 66.11,54.77 ; U800.H4 v1(62.9,59.29) ; U800.H4 U800.G4 v1(62.9,60.59) ; U800.H4 U800.G3 ; U800.G9 v1(66.8,59.94) U800.H9 ; U800.G9 v1(66.15,60.59) U800.F9 v1(66.15,61.24) U800.E9 ; U800.G9 v1(66.15,59.94) U800.H9 ; U800.L10 U800.M9 U800.L8 ; U800.L10 67.45,57.34 U800.M10 U800.L9 U800.M8 ; U800.M7 v1(65.5,56.69) ; U800.M7 v1(65.5,57.34) ; U800.M7 v1(64.85,56.69) U800.N7 ; v1(65.5,56.69) U800.N7 ; v1(65.5,56.69) U800.M8 ; U800.L6 U800.L7 ; U800.L7 v1(65.5,57.99) U800.L8 ; U800.L7 v1(65.5,57.34) ; U800.K14 v1(69.4,57.99) U800.K13 ; U800.K14 v1(70.05,57.99) U800.L15 ; U800.K14 v1(70.05,58.64) ; U800.K14 v1(69.4,58.64) U800.K13 ; 64.21,61.25 64.34,61.12 64.34,61.09 ; U800.E11 U800.E12 v1(68.75,61.89) ; U800.E11 U800.D11 v1(68.1,62.54) ; U800.E11 U800.E10 66.98,61.71 66.62,61.71 U800.E9 ; U800.H9 v1(66.15,59.29) U800.J8 ; U800.J4 U800.K3 62.27,58.01 ; U800.C17 v1(72,62.54) U800.D17 ; U800.E14 v1(69.4,61.89) U800.D14 ; U800.E14 v1(70.05,61.89) ; U800.E14 70.05,61.24 U800.E15 v1(70.7,61.24) ; U800.E14 69.42,61.26 ; v1(65.5,59.94) U800.G8 ; v1(70.7,61.24) U800.E16 ; v1(70.7,61.24) v1(71.35,60.59) ; v1(70.7,61.24) v1(70.05,60.59) U800.G15 70.06,59.95 70.04,59.95 ; U800.N3 U800.P3 62.59,55.71 v1(62.83,55.47) ; v1(63.55,63.84) U800.B4 ; U800.J8 v1(65.5,58.64) ; U800.J8 v1(65.5,59.29) ; U800.F17 v1(71.35,60.59) ; U800.F4 v1(63.55,61.24) ; U800.U11 v1(68.1,53.44) U800.V11 ; U800.E6 64.49,61.53 64.2,61.53 v1(64.2,61.89) ; U800.E6 v1(64.2,61.89) ; U800.E6 v1(64.85,61.89) U800.E6 ; U800.E6 v1(64.2,61.89) ; 64.2,60.59 64.2,60.59 64.34,60.73 ; 64.2,60.59 U800.F5 ; 64.2,60.59 64.23,60.56 ; U800.M8 v1(65.5,57.34) ; v1(64.2,61.89) U800.D6 ; v1(64.2,61.89) U800.E5 ; U800.E9 v1(66.15,61.89) U800.D8 v1(65.5,61.89) ; v2(84.75,52.92) 85.14,53.31 v2(85.67,53.31) 86.44,53.31 v2(86.46,53.33) ; U800.E8 v1(65.5,61.24) 65.5,61.6 ; U800.W1 61.04,52.46 ; U1701.P9 69.02,79.51 69.02,79.02 69.57,78.47 U1701.M9 ; U800.H14 69.72,59.63 70.04,59.95 ; U800.H14 v1(70.05,59.29) U800.H15 70.04,59.95 ; v1(65.5,57.34) U800.L8 ; U800.E13 69.37,61.26 ; v1(71.35,56.04) U800.P16 U800.P15 ; U800.K17 v1(72,58.64) U800.J17 71.53,59.11 71.53,59.47 U800.H17 ; U800.L17 v1(72,57.99) ; U800.L15 v1(70.05,57.34) U800.M15 ; v2(87.31,49.86) 87.22,49.95 87.22,50.27 ; 62.25,56.04 62.25,56.04 ; U800.V8 U800.W9 U800.W8 ; U800.V8 65.5,52.79 U800.W7 ; U800.R15 U800.P15 ; U800.P15 70.41,55.75 v1(70.41,56.03) 70.41,56.32 U800.N15 ; U800.N13 68.74,56.03 ; 68.74,56.03 68.74,56.04 U800.N12 ; v1(65.5,60.59) U800.F8 ; v1(65.5,60.59) U800.F7 64.87,60.61 64.82,60.61 64.52,60.31 U800.G6 64.23,60.56 ; v1(65.5,60.59) 65.5,60.23 ; U800.N7 U800.P7 ; v1(72.65,61.89) U800.E19 ; 64.23,60.56 64.52,60.56 U800.F6 ; U800.B14 v1(70.05,63.19) U800.C14 v1(70.05,62.54) ; 64.34,60.73 U800.F6 ; 64.34,60.73 U800.F6 ; U800.F6 64.85,61.24 ; 70.04,59.95 U800.G14 ; 65.64,78.78 65.64,79.84 65.42,80.06 65.67,80.31 v2(65.67,81.36) ; U1701.F9 69.26,73.66 69.23,73.64 ; v2(86.37,50.76) 86.37,50.83 v2(87.21,51.67) ; v1(62.25,60.59) U800.G2 ; U800.C6 v1(64.2,63.19) ; v1(62.25,63.19) U800.C3 62.39,62.68 62.39,62.32 62.5,62.21 U800.D3 ; U800.AA1 v2(60.87,51.16) ; v1(63.55,52.79) U800.W5 ; v1(68.1,63.19) U800.C11
  TOP w0.3: v2(86.46,53.33) 86.59,53.19 86.72,53.19 ; U800.E7 64.85,61.24 U800.F6 ; U800.E7 v1(64.85,61.89) ; U800.E7 v1(65.5,61.24) ; U800.E7 65.21,61.6 ; v1(65.5,59.94) U800.H8 ; v1(65.5,59.94) 65.21,60.23 ; v1(65.5,59.94) U800.G8 ; U800.H8 v1(66.15,59.29) U800.J9 ; U800.H8 v1(66.15,59.94) U800.G8 ; U800.H8 v1(65.5,59.29) ; v1(60.95,62.54) U800.C1 v1(61.6,62.54) ; U800.E5 v1(63.55,61.24) ; U800.E5 v1(64.2,61.89) ; U800.E5 v1(63.55,61.89) U800.E4 ; U800.E5 64.34,61.09 U800.G7 ; v1(63.55,61.24) U800.F5 U800.E6 ; v1(63.55,61.24) U800.E4 ; U800.F8 v1(66.15,61.24) U800.E8 ; U800.F8 v1(65.5,60.59) ; U800.F8 v1(66.15,60.59) U800.G8 ; U800.F8 v1(65.5,61.24) ; U800.L12 v1(68.1,57.99) U800.L11 ; U800.L12 v1(68.75,57.34) ; U800.L12 v1(68.75,57.99) U800.L13 ; U800.L12 U800.M11 67.45,57.34 U800.L11 ; v1(57.92,80.51) U1700.P9 ; U1701.D8 v1(69.97,72.46) U1701.E8 ; v1(73.3,58.64) U800.J20 ; U1701.T1 v1(76.37,82.06) ; U800.C18 v1(72,62.54) U800.D18 ; U800.C18 v1(72.65,63.19) ; U800.C18 v1(72.65,62.54) U800.D18 ; U800.M13 U800.N12 ; U800.M13 v1(68.75,57.34) ; U800.M13 v1(69.4,56.69) ; U800.M13 v1(69.4,57.34) ; U800.M12 v1(68.75,57.34) ; U800.M12 U800.N13 ; U800.M12 U800.L11 ; v1(68.75,57.34) U800.L13 ; U800.D18 v1(72,61.89) ; U800.D18 v1(72.65,61.89) U800.E19 v1(73.3,61.89) ; 65.21,61.6 v1(65.5,61.89) U800.E8 ; 65.21,61.6 65.5,61.6 ; U800.P3 U800.R4 v1(62.9,54.74) U800.T3 v1(62.25,54.74) ; U800.P3 v1(62.25,55.39) U800.R2 ; U800.P3 62.25,56.04 U800.N3 ; U800.L14 v1(70.05,57.99) ; U800.L14 v1(69.4,57.99) U800.L13 ; U800.L14 v1(69.4,57.34) ; U800.L14 v1(70.05,57.34) ; U800.V4 62.82,52.71 ; U800.V4 v1(63.55,52.79) ; U800.V4 v1(62.9,53.44) U800.U4 ; 62.82,52.71 U800.W3 v1(62.25,52.79) ; 62.82,52.71 62.97,52.71 U800.W4 v1(63.55,52.79) ; U800.L13 v1(69.4,57.34) ; U800.N13 v1(69.4,56.69) ; U800.N13 v1(69.4,56.04) U800.N14 ; v1(76.37,70.06) U1701.B1 ; 71.02,60.26 v1(71.35,59.94) U800.H17 71.92,59.86 ; 71.02,60.26 v1(71.35,60.59) ; 71.02,60.26 v1(70.7,60.59) ; v1(63.55,52.79) U800.W5 ; 65.21,60.23 U800.G7 ; 65.21,60.23 65.5,60.23 ; U800.L11 U800.K10 ; v1(65.5,55.39) U800.R8 ; U800.R8 66.11,54.77 ; U800.R8 65.52,54.76 65.47,54.76 U800.T8 66.47,53.77 66.48,53.77 ; U1701.M1 76.01,78.5 76.01,78.53 v2(76.35,78.86) ; U800.J13 v1(68.75,58.64) U800.J12 ; U800.J13 v1(69.4,58.64) U800.J14 ; U800.J13 v1(69.4,59.29) U800.J14 ; U800.J13 v1(68.75,59.29) U800.J12 ; U800.J12 v1(68.1,58.64) U800.J11 ; U800.J12 v1(68.1,59.29) U800.J11 ; 69.72,60.91 v1(70.05,60.59) ; 69.72,60.91 69.37,61.26 69.42,61.26 ; 69.72,60.91 70.05,61.24 v1(70.7,60.59) ; v1(70.05,60.59) U800.G15 v1(70.7,60.59) ; v1(70.05,60.59) U800.G14 ; v1(75.57,72.46) U1701.E2 ; v1(75.57,72.46) U1701.E1 ; v1(75.57,72.46) U1701.D1 ; U800.K8 v1(65.5,57.99) ; U800.K8 v1(66.15,58.64) U800.J9 ; U800.K8 v1(65.5,58.64) ; U800.K8 v1(66.15,57.99) U800.L9 v1(66.8,57.99) U800.K10 ; v1(57.97,69.26) U1700.A9 v1(57.97,70.06) U1700.B9 ; 76.2,80.33 77.72,81.85 v1(77.72,82.06) ; 76.2,80.33 76.2,80.29 U1701.P1 75.97,80.1 76.2,80.33 ; v1(69.4,56.69) U800.M14 ; v1(69.4,56.69) U800.N14 ; U800.A21 v1(73.95,63.84) ; v1(71.35,63.84) U800.B16 ; v1(70.7,60.59) v1(71.35,61.24) U800.E16 ; v1(66.8,59.94) U800.H10 ; U800.H10 v1(67.45,59.29) U800.J11 ; U800.H10 v1(67.45,59.94) ; U800.H10 v1(66.8,59.29) U800.J9 ; U800.E8 v1(66.15,61.89) ; U800.E8 v1(65.5,61.24) ; U800.L5 U800.L6 ; U800.F7 v1(65.5,60.59) ; U800.F7 v1(65.5,61.24) ; U800.F7 U800.E6 ; v1(65.5,60.59) U800.G7 ; v1(65.5,60.59) U800.G8 ; v1(64.37,76.46) U1700.J2 ; U800.M14 U800.N15 70.12,56.11 70.12,55.96 ; U800.M14 v1(70.05,57.34) ; U800.M14 v1(69.4,57.34) ; v1(72,57.99) U800.K17 ; U800.K17 v1(72,58.64) ; U800.K17 71.42,58.06 ; U1700.D8 v1(58.77,72.46) U1700.E8 ; U1700.D8 v1(58.77,71.66) ; U1700.D8 v1(59.57,72.46) U1700.E8 ; v1(61.6,60.59) U800.G2 v1(62.25,60.59) U800.G3 v1(62.9,60.59) U800.F4 ; v1(69.4,53.44) U800.U14 ; 63.22,58.31 v1(63.55,57.99) U800.L4 ; 63.22,58.31 v1(62.9,57.99) ; 63.22,58.31 62.92,58.61 62.92,58.66 ; v1(76.37,74.06) U1701.G1 ; v1(70.05,62.54) U800.D14 ; U800.D14 v1(70.05,61.89) U800.E15 v1(70.7,61.89) U800.E16 ; U800.D14 v1(69.4,61.89) U800.E13 v1(68.75,61.89) ; U800.K3 v1(62.9,57.99) ; v1(62.9,57.99) U800.L4 ; U800.J9 v1(66.8,58.64) U800.K10 ; v2(58.77,81.26) U1700.T9 ; U1700.T9 v1(57.97,82.06) ; U1700.T9 v1(58.77,82.06) ; v1(64.85,61.89) U800.D6 v1(64.2,62.54) U800.C6 ; v1(64.85,61.89) U800.E6 ; v1(62.9,61.24) U800.E4 ; U800.E4 v1(62.9,61.89) U800.D3 v1(62.25,61.89) ; v1(62.25,54.74) U800.R2 ; v1(62.25,54.74) U800.T2 v1(61.6,54.74) U800.R2 ; U1701.B9 v1(69.17,70.06) U1701.A9 v1(69.17,69.26) ; v2(56.42,73.76) 57.02,74.36 58.27,74.36 U1700.G9 v1(58.77,74.86) U1700.G8 ; U800.J11 v1(67.45,58.64) U800.K10 ; 70.12,55.96 U800.P15 ; 70.12,55.96 U800.N14 ; U800.J14 v1(70.05,58.64) ; U800.J14 v1(70.05,59.29) U800.H15 U800.G14 ; U800.M15 v1(70.05,57.34) ; U800.M15 U800.N14 ; U800.M15 70.7,57.34 ; U800.T11 v1(68.1,54.09) U800.T12 ; v1(71.35,61.89) U800.E16 ; U800.G14 69.4,59.94 ; U1701.T9 v2(69.97,81.26) ; U800.B14 v1(70.05,63.19) ; U800.J4 v1(62.9,59.29) ; v1(65.17,70.06) U1700.B1 ; v1(60.95,64.49) U800.A1 ; U1700.E2 v1(64.37,73.26) U1700.E1 ; v1(62.77,70.86) U1700.B3 ; U1700.T1 64.78,81.67 65.07,81.39 65.67,81.39 v2(65.67,81.36) ; U1700.E8 v1(59.57,73.26) ; U800.L4 v1(63.55,57.34) ; 71.92,59.86 71.92,60.01 ; 71.92,59.86 U800.G18 v1(72,60.59) ; 62.27,58.01 62.24,58.01 62.24,57.98 61.82,57.56 60.1,57.56 v2(60.08,57.58) ; U1700.M1 65.33,78.46 65.64,78.78 ; U1700.M9 v2(57.97,78.86) ; U800.V8 65.5,52.79 U800.W8 ; U1700.G1 65.17,74.06 v1(65.22,73.96) ; v1(57.97,73.66) U1700.F9 ; v1(74.77,57.66) U800.L21 ; v1(68.1,53.44) U800.V11 ; v1(68.75,73.64) 68.77,73.64 68.8,73.6 U1701.F9 ; v1(66.15,53.44) 66.8,54.09 ; 64.85,55.39 64.52,55.06 64.82,54.76 ; U1700.D1 v1(65.17,71.66) ; U800.C9 v1(66.8,62.54) ; v1(74.02,70.11) U1701.B3 ; 65.42,80.06 U1700.P1 ; v1(75.57,76.46) U1701.J2 ; v1(70.77,76.46) U1701.J8
  TOP w0.35: v2(90.32,51.18) 90.17,51.33 v2(90.17,52.56) 90.17,55.06 89.87,55.36 v2(88.77,55.36) ; v2(77.87,55.71) 77.87,55.65 76.87,55.65 C1300.2
  TOP w0.381: 45.66,76.92 45.66,77.16 v3(46.14,77.64) 46.68,77.1 46.68,76.92 ; C1736.2 85.97,78.72 85.54,79.15 v3(85.54,79.31) ; 47.88,77.03 v3(47.88,77.72) ; v3(94.35,93.58) 94.35,93.76 ; 96.27,90.91 v3(96.27,90.92)
  TOP w0.4: v2(83.37,65.21) v2(83.37,63.91) 83.37,62.61 78.46,57.7 77.56,57.7 77.53,57.67 v2(77.43,57.67)
  TOP w0.406: C1204.2 v2(44.17,80.01) ; 42.55,81.08 v2(43.13,81.08)
  BOTTOM w0.1: C1705.2 v2(68.17,81.21) ; v2(88.12,51.81) 88.07,51.86 88.07,55.61 v2(87.72,55.96) ; v2(88.77,55.36) 88.77,56.46 88.57,56.66 v2(87.72,56.66)
  BOTTOM w0.102: v2(68.07,74.91) 67.67,74.51 C1709.2 ; v1(69.17,69.26) 68.89,69.54 68.89,69.78 69.05,69.94 ; C1724.2 60.06,68.06 ; v2(84.35,86.55) 84.35,86.55 SW1301.1 ; v2(90.73,83.54) 90.77,83.58 D1301.2
  BOTTOM w0.254: C1704.2 v1(78.72,76.56) ; v1(76.37,70.06) 76.17,70.26 C1725.2 ; v1(66.72,68.46) 66.72,68.27 C1712.2 ; C1751.2 C1732.2
  BOTTOM w0.3: C1703.2 v2(76.17,68.01) C1729.2 ; v1(76.37,70.06) 76.37,70.51 C1725.2 ; v2(65.67,81.36) 65.47,81.56 C1731.2 v1(65.87,81.96) ; R908.2 v2(77.87,55.71) ; 58.67,78.89 58.67,78.86 v2(57.97,78.86) ; 58.67,78.89 58.65,78.89 ; 58.67,78.89 C1713.2 58.67,78.96 ; C1722.2 62.27,73.51 v1(62.32,73.46) ; C1718.2 65.17,71.01 v1(65.17,70.06) ; C1718.2 65.27,71.02 ; C1718.2 65.17,71.11 v1(65.17,71.66) ; v2(68.07,74.91) 67.62,74.53 C1709.2 ; v2(67.32,72.46) 67.72,72.46 C1702.2 67.72,72.97 v1(68.22,73.47) ; v1(76.37,82.06) 76.37,82.71 C1726.2 ; v1(64.37,73.26) 64.4,73.24 64.4,72.66 C1733.2 ; C1724.2 60.06,68.06 v1(60.42,67.66) ; v1(75.57,72.46) 76.17,72.46 C1732.2 C1751.2 ; v1(69.17,70.06) 69.05,69.94 69.05,69.66 C1707.2 69.17,69.41 v1(69.17,69.26)
  BOTTOM w0.305: C1725.2 76.22,70.47 R1719.2
  BOTTOM w0.381: v2(67.07,71.61) 67.42,71.26 C1716.2 C1727.2 67.72,72.46 ; v2(60.57,78.06) 60.37,78.26 C1715.2 59.77,78.26 v2(59.57,78.06) ; v1(65.82,68.76) 66.37,68.21 66.37,68.11 ; v1(66.72,68.46) 66.37,68.11 ; 66.37,68.11 C1712.2
  BOTTOM w0.4: v2(57.62,76.01) C1700.2 ; v1(65.17,70.06) 65.2,70.04 65.2,69.61 C1720.2
  BOTTOM w0.508: 82.19,80.87 C1714.2 81.97,82.06 82.52,82.62 82.52,83.01 v2(82.63,83.11)
  vias: v1(59.38,51.39) v1(59.48,51.89) v1(60.35,52.14) v1(60.47,55.39) v1(60.86,58.56) v1(62.77,85.73) v1(65.5,52.16) v1(66.77,82.41) v1(66.8,53.43) v2(42.01,89.13) v2(43.97,62.77) v2(44.01,60.15) v2(44.5,63.7) v2(44.62,60.94) v2(45.77,85.01) v2(46.11,84.32) v2(47.66,80.3) v2(47.71,71.57) v2(47.92,67.15) v2(49.75,56.09) v2(49.84,55.37) v2(50.1,85.09) v2(50.22,65.48) v2(50.67,80.98) v2(50.63,75.95) v2(50.59,70.82) v2(50.66,57.91) v2(50.91,64.59) v2(51.09,86.29) v2(51.88,78.45) v2(51.88,74.49) v2(51.92,63.81) v2(51.97,57.8) v2(52.02,81.75) v2(52.15,90.36) v2(52.11,71.16) v2(52.4,84.04) v2(52.52,68.49) v2(52.66,61.14) v2(52.66,60.27) v2(52.71,59.26) v2(52.76,57.7) v2(52.86,86.47) v2(53.14,91.48) v2(53.49,85.71) v2(53.66,83.05) v2(53.64,79.27) v2(53.65,77.18) v2(53.68,75) v2(53.65,69.07) v2(53.74,81.26) v2(53.7,72.66) v2(53.74,57.47) v2(53.77,56.68) v2(53.81,69.78) v2(53.86,48.07) v2(54.45,67.7) v2(54.42,58.26) v2(54.55,67.06) v2(54.51,63.43) v2(54.88,83.68) v2(54.85,81.3) v2(54.94,77) v2(55.01,79.17) v2(55.01,74.7) v2(55,70.75) v2(55.12,66.22) v2(55.26,86.48) v2(55.37,82.42) v2(55.37,58.51) v2(55.39,48.45) v2(55.61,60.47) v2(55.85,81.09) v2(55.92,84.3) v2(56.07,69.31) v2(56.42,79.11) v2(56.42,78.21) v2(56.47,77.31) v2(56.42,72.96) v2(56.42,72.06) v2(56.58,83.44) v2(56.57,61.43) v2(56.67,68.41) v2(56.67,66.29) v2(57.07,62.58) v2(57.02,56.86) v2(57.55,84.64) v2(57.67,83.31) v2(57.73,61.97) v2(57.88,63.42) v2(57.89,65.49) v2(58.08,83.84) v2(58.07,55.31) v2(58.28,64.59) v2(58.57,54.16) v2(58.6,83.9) v2(58.77,57.56) v2(59.36,84.67) v2(59.57,57.56) v2(59.58,45.36) v2(60.32,62.46) v2(61.19,47.17) v2(61.47,84.81) v2(61.72,45.59) v2(62.81,48.64) v2(62.87,46.61) v2(63.83,48.01) v2(64.14,47.12) v2(64.56,85.76) v2(65.1,48.01) v2(65.41,46.35) v2(66.15,45.63) v2(68.31,41.99) v2(68.92,40.75) v2(70.23,42.22) v2(70.39,44.57) v2(70.45,41.13) v2(70.94,42.11) v2(74.88,50.57) v2(75.55,49.94) v2(76.1,47.96) v2(81.51,84.6) v2(81.69,57.69) v2(82.07,58.71) v2(82.07,54.66) v2(82.1,86.96) v2(82.37,52.48) v2(82.67,53.91) v2(82.69,52.83) v2(83.25,84.21) v2(83.27,56.36) v2(83.28,47.81) v2(83.34,59.97) v2(83.44,72.56) v2(83.44,71.7) v2(83.45,69.72) v2(83.47,68.12) v2(83.45,66.8) v2(83.57,78.81) v2(83.69,80.48) v2(83.83,93.23) v2(84.4,44.98) v2(84.77,56.66) v2(84.71,50.28) v2(84.72,47.76) v2(85.02,73.01) v2(85.07,72.06) v2(85.17,70.16) v2(85.17,69.16) v2(85.21,82.83) v2(85.52,55.56) v2(85.62,80.27) v2(85.67,64.71) v2(85.82,47.76) v2(86.02,91.24) v2(86.02,88.74) v2(86.16,90.29) v2(86.55,63.02) v2(86.57,55.91) v2(86.84,88.3) v2(87.17,47.76) v2(87.59,86.03) v2(87.55,81.56) v2(87.75,88.31) v2(88.04,87.81) v2(88.21,86.76) v2(88.7,87.32) v2(89.47,47.86) v2(89.7,62.67) v2(89.92,47.07) v2(90,82.64) v2(90.08,60.97) v2(90.23,62.64) v2(90.61,60.94) v2(90.76,62.63) v2(90.71,59.75) v2(91.13,60.93) v2(91.22,62.63) v2(91.6,60.93) v2(91.75,62.67) v2(92.23,39.74) v2(92.32,50.36) v2(92.32,49.36) v2(92.32,48.36) v2(92.52,52.91) v2(93.92,54.11) v2(94.15,44.09) v2(95.36,90.77) v2(95.66,91.83) v2(95.72,69.76) v2(95.7,68.76) v2(95.73,67.4) v2(95.79,60.61) v2(95.75,59.88) v2(96.17,81.91) v2(97.03,88.32) v2(97.53,68.57) v2(98.27,45.33) v2(98.61,81.3) v2(98.6,44.13) v2(98.95,61.99) v2(99.2,39.48) v2(99.66,46.73) v2(101.29,39.3) v2(102.23,76.05) v2(102.2,67.54) v2(102.2,63.68) v3(41.49,64.02) v3(41.72,78.88) v3(41.92,73.51) v3(41.95,67.42) v3(41.96,65.1) v3(41.97,44.1) v3(42.09,88.01) v3(42.02,86.61) v3(42.07,48.09) v3(42.67,92.46) v3(42.71,84.05) v3(42.88,75.47) v3(42.81,57.95) v3(42.99,65.18) v3(44.07,89.5) v3(44.07,88.58) v3(44.07,85.62) v3(44.37,72.46) v3(44.45,77.57) v3(44.73,42.96) v3(44.95,68.82) v3(45.01,91.69) v3(45.03,44.08) v3(45.28,84.37) v3(45.97,72.75) v3(46.2,75.28) v3(46.27,44.13) v3(46.25,39.88) v3(46.33,68.8) v3(46.34,64.37) v3(46.38,56.71) v3(46.38,48.12) v3(46.38,42.6) v3(46.55,88.29) v3(46.67,86.41) v3(46.63,73.27) v3(46.81,84.34) v3(47.67,78.62) v3(47.89,44.1) v3(47.97,64.37) v3(47.99,48.09) v3(47.95,42.82) v3(48.04,84.91) v3(48.07,79.76) v3(48.03,73.27) v3(48.04,72.38) v3(48.06,68.95) v3(48.11,54.17) v3(48.78,88.35) v3(49.28,93.69) v3(49.63,57.42) v3(49.76,43.29) v3(49.82,66.12) v3(49.89,54.33) v3(50.25,51.1) v3(50.29,64.79) v3(50.29,48.51) v3(50.35,44.15) v3(50.5,88.86) v3(51.35,51.78) v3(52.06,75.89) v3(52.16,91.94) v3(52.81,43.2) v3(53.38,88.91) v3(53.34,48.07) v3(53.34,38.1) v3(54.04,91.52) v3(54.11,89.04) v3(54.11,44.1) v3(54.13,39.57) v3(54.27,93.52) v3(54.25,40.66) v3(54.5,88.47) v3(54.9,89.03) v3(54.93,51.38) v3(55.43,85.76) v3(55.5,88.34) v3(55.62,88.98) v3(56.09,52.06) v3(56.42,88.91) v3(57.42,85.86) v3(58.83,41.68) v3(58.94,90.41) v3(59.13,85.9) v3(60.11,86.17) v3(61.3,39.35) v3(62.06,92.92) v3(63.9,90.04) v3(66.29,90.19) v3(67.05,91.86) v3(69.41,91) v3(69.43,89.68) v3(72.73,89.65) v3(75.85,85.81) v3(75.91,89.65) v3(78.39,85.88) v3(78.83,89.65) v3(81.3,93.34) v3(81.77,92.92) v3(81.94,93.57) v3(81.92,90.75) v3(82.54,92.91) v3(82.9,93.56) v3(83.18,92.89) v3(85.65,93.27) v3(86.97,93.38) v3(87.35,79.62) v3(88.1,79.71) v3(88.84,93) v3(89.55,80.12) v3(89.56,70.9) v3(89.56,70.39) v3(89.56,69.89) v3(89.56,69.38) v3(89.56,68.87) v3(89.78,80.8) v3(90.06,70.9) v3(90.06,70.39) v3(90.06,69.89) v3(90.06,69.38) v3(90.06,68.87) v3(90.19,77.12) v3(90.34,80.14) v3(90.57,70.9) v3(90.57,70.39) v3(90.57,69.89) v3(90.57,69.38) v3(90.57,68.87) v3(90.71,85.26) v3(90.81,77.11) v3(91.08,70.9) v3(91.08,70.39) v3(91.08,69.89) v3(91.08,69.38) v3(91.08,68.87) v3(91.44,77.08) v3(91.44,38.1) v3(91.59,70.9) v3(91.59,70.39) v3(91.59,69.89) v3(91.59,69.38) v3(91.59,68.87) v3(91.78,81.03) v3(93.97,80.45) v3(93.98,38.1) v3(94.08,84.12) v3(94.17,55.2) v3(94.6,46.72) v3(95.12,72.81) v3(95.81,71.1) v3(95.94,92.76) v3(96.26,78.96) v3(96.43,46.9) v3(96.52,38.1) v3(96.7,47.58) v3(96.79,75.38) v3(97.25,77.58) v3(97.36,75.85) v3(97.49,76.7) v3(97.49,73.93) v3(97.43,67.6) v3(97.53,72.41) v3(97.53,70.59) v3(97.57,49.36) v3(97.55,47.13) v3(97.9,80.18) v3(98.3,92.76) v3(98.82,74.13) v3(99.19,91.06) v3(99.24,90.17) v3(101.39,86.61) v3(102.33,88.88) v3(102.55,90.61) v4(53.84,50.7) v4(82.32,85.81) v4(84.28,81.59)
VCC18_CODEC: length 7.7
  TOP w0.3: U800.N5 v1(63.55,56.04)
  BOTTOM w0.102: L1501.2 58.77,53.36
  BOTTOM w0.3: v1(63.55,56.04) 63.97,55.61 63.97,55.15 63.14,54.31 62.22,54.31 61.57,53.66 C1501.1
  BOTTOM w0.4: 58.77,53.36 58.77,53.54 59.95,53.54 C1502.1 60.85,53.61 C1501.1
VCC_18: length 124
  TOP w0.3: U800.M16 v1(71.35,56.69) U800.N16
  TOP w0.381: C1204.1 42.6,79.5 43.42,78.68 43.42,65.61 46.57,62.46 v2(52.89,62.46)
  TOP w0.4: v2(85.08,58.08) 85.65,57.51 88.72,57.51 90.67,55.56 90.67,53.07 91.03,52.72 91.03,47.82 92.41,46.44 v2(93.73,46.44)
  L3 w0.406: v2(56.25,43.45) 56.58,43.12 90.41,43.12 v2(93.73,46.44)
  BOTTOM w0.102: L1501.1 57.25,53.4 57.17,53.4 ; 57.32,58.99 57.4,58.99 L901.1 57.32,58.91 ; L1201.1 57.17,50.56 ; L1401.1 57.17,51.96
  BOTTOM w0.35: R906.1 78.25,55.24 76.54,55.24 75.74,56.04 72,56.04 v1(71.35,56.69)
  BOTTOM w0.381: 56.52,44.52 56.52,49.91 57.17,50.56 ; C909.1 55.53,59.06 54.91,59.69 54.91,62.07 54.53,62.46 v2(52.89,62.46)
  BOTTOM w0.4: 57.32,58.91 57.32,59.06 C909.1 56.05,58.99 55.92,58.86 55.92,54.73 57.17,53.48 57.17,50.56 ; C910.1 70.77,56.69 v1(71.35,56.69) ; v2(85.08,58.08) 83.09,58.08 80.48,55.46 R909.1 79.26,55.45 78.49,55.45 R906.1
  BOTTOM w0.406: v2(56.25,43.45) 56.52,43.72 56.52,44.52
